# Altium PCB alertButton.PcbDoc (part 1 of 2)
Units mm, origin at the board's own origin, x right, y up, seen from the top; angles counter-clockwise.
Board outline 28.5 x 30 mm, 6 copper layers (Top Layer, Layer 1, Layer 2, Layer 3, Layer 4, Bottom Layer), stack 1.032 mm thick; 73 components, 33 nets, 250 pads, 221 vias.
Unrouted connection lines stored in the file: 13.
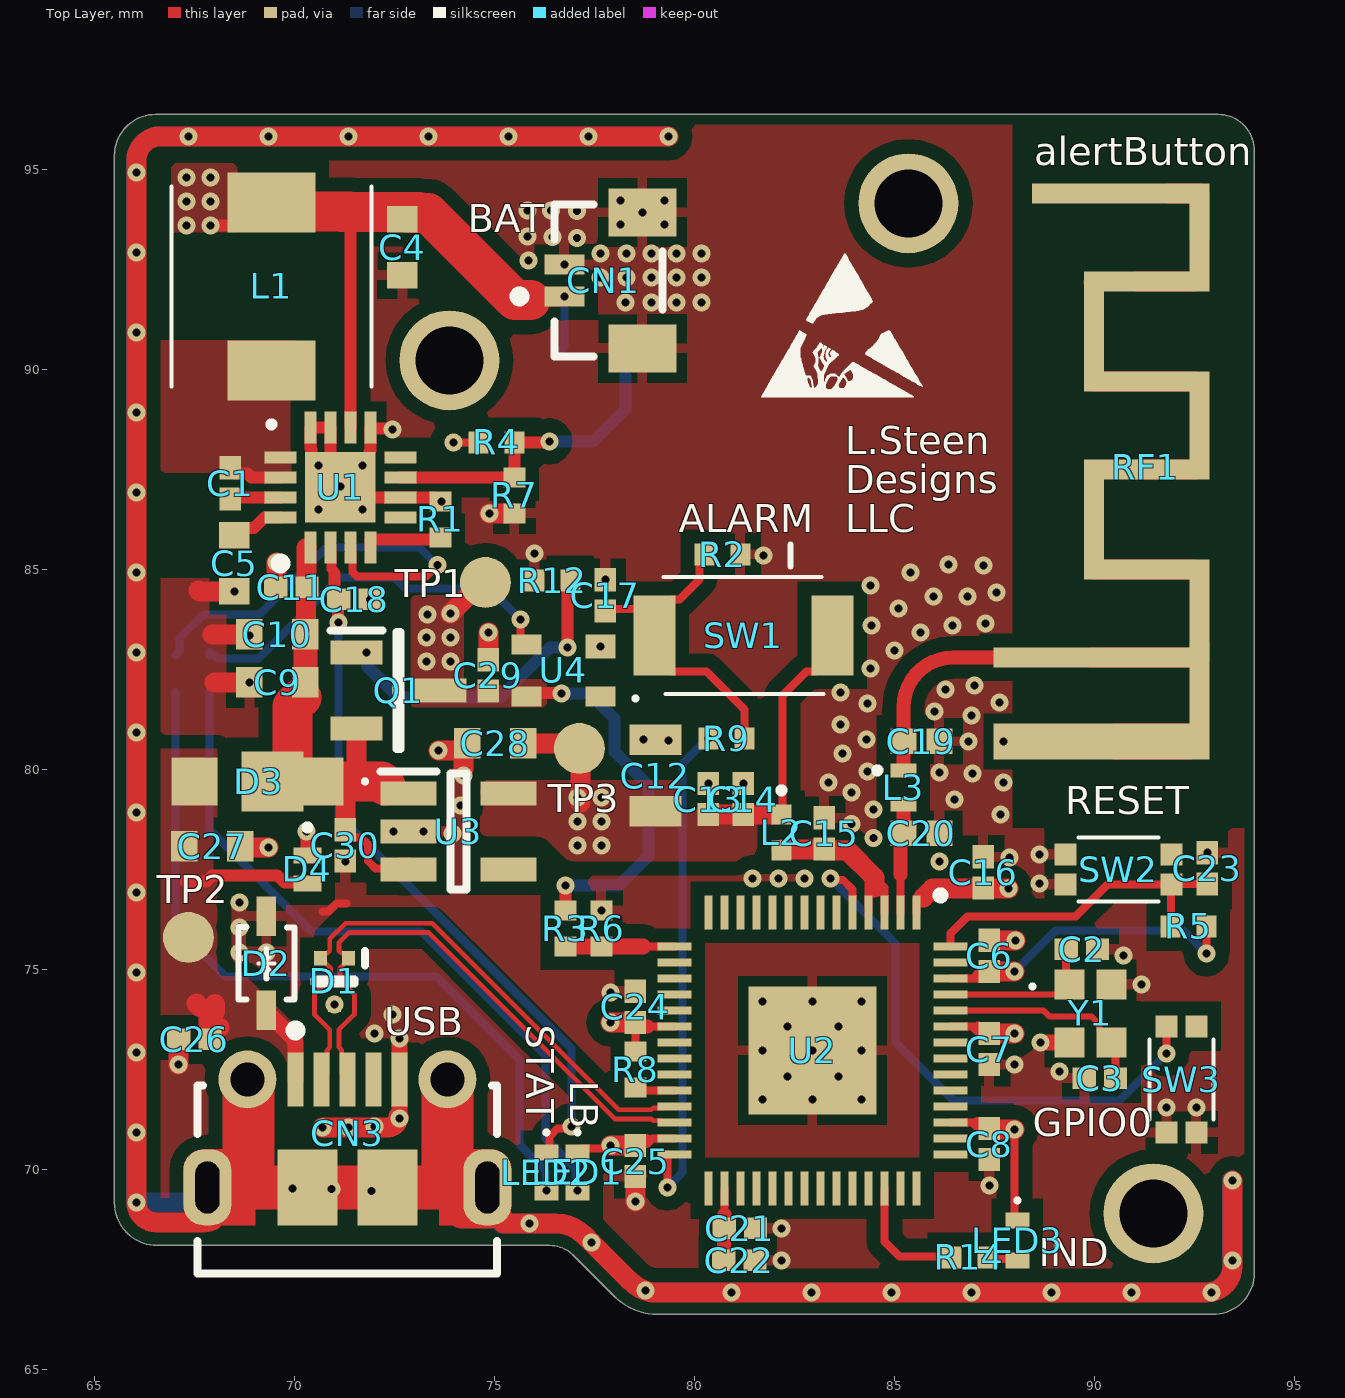
[diagram p0: Top Layer view]
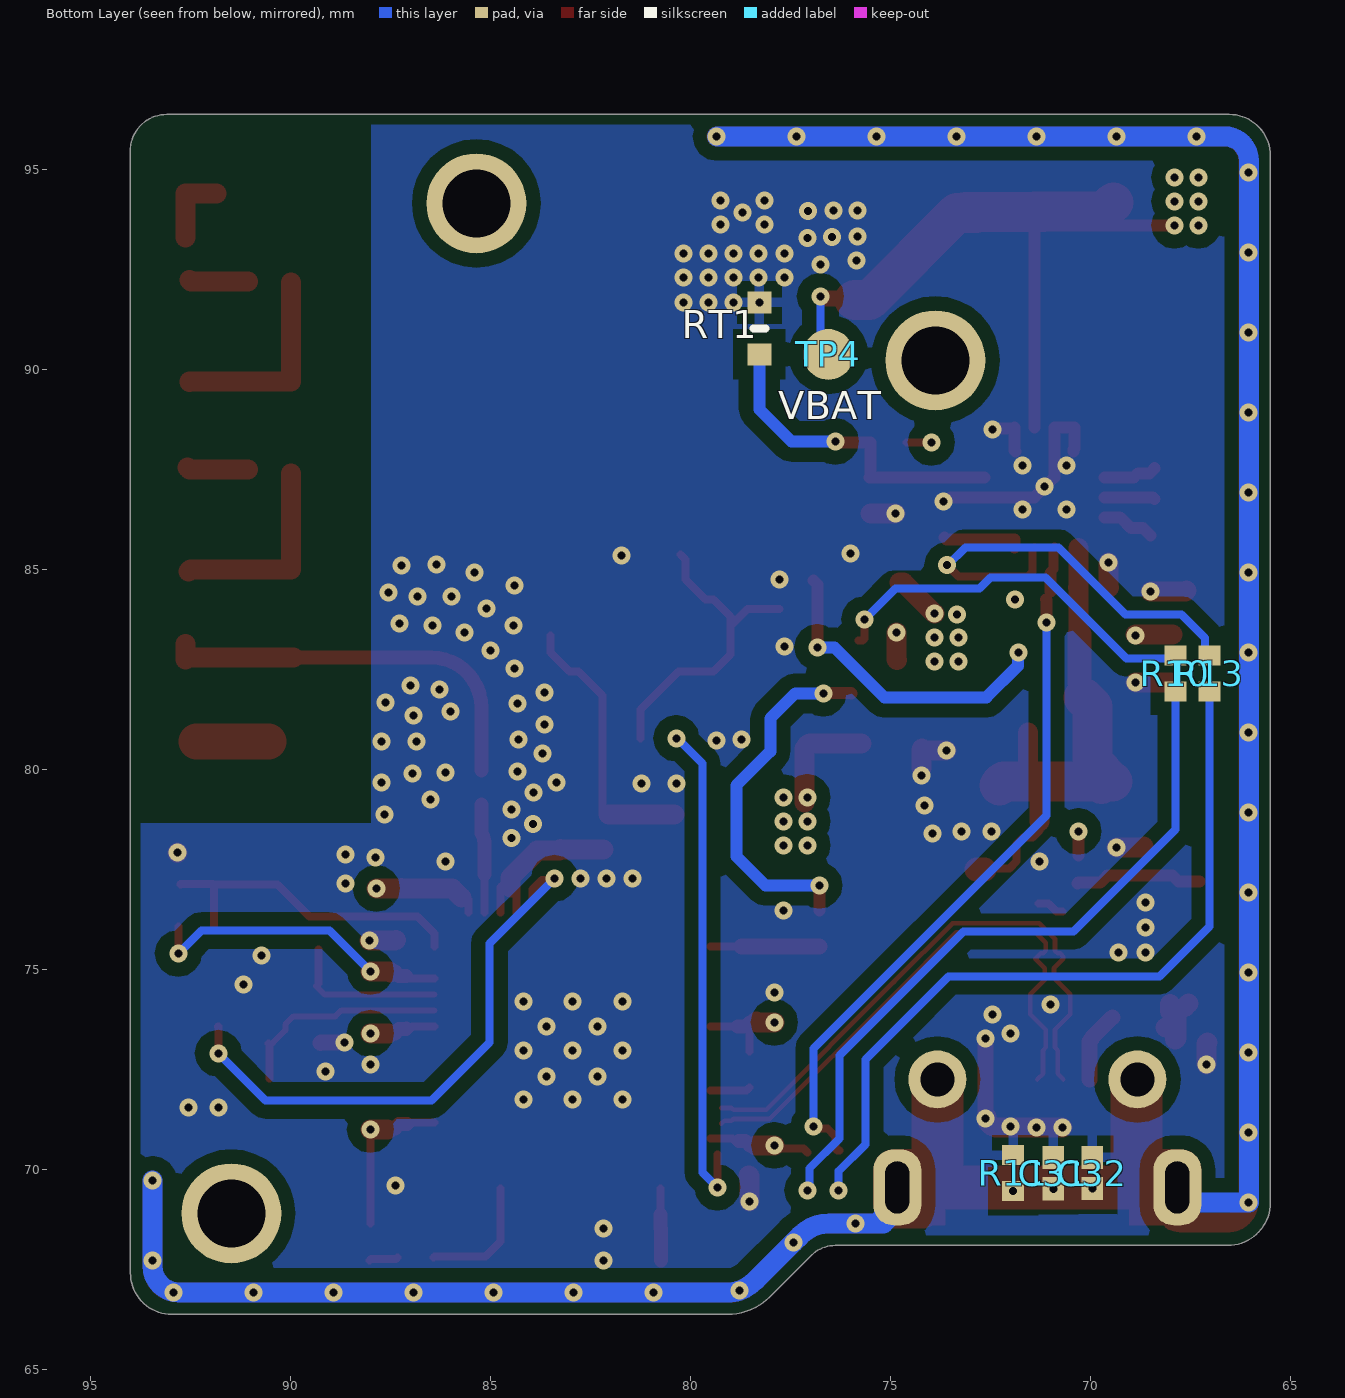
[diagram p1: Bottom Layer view, seen from below]
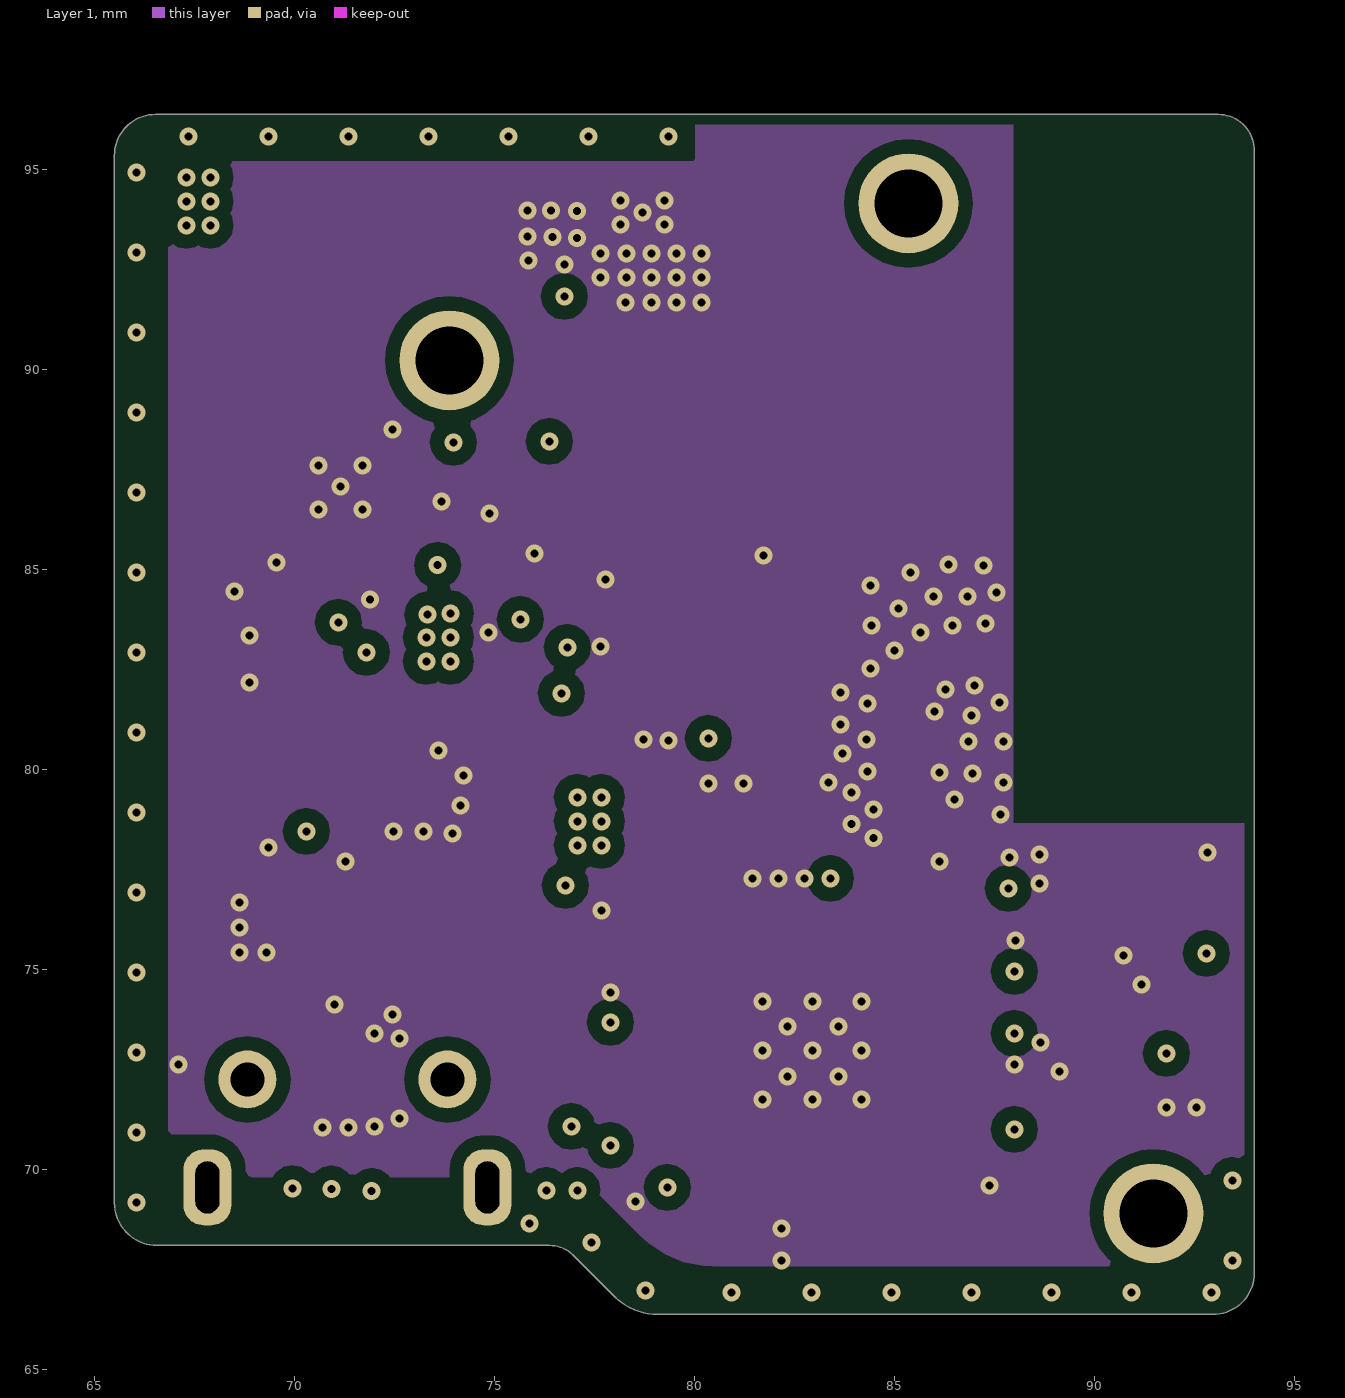
[diagram p2: Layer 1]
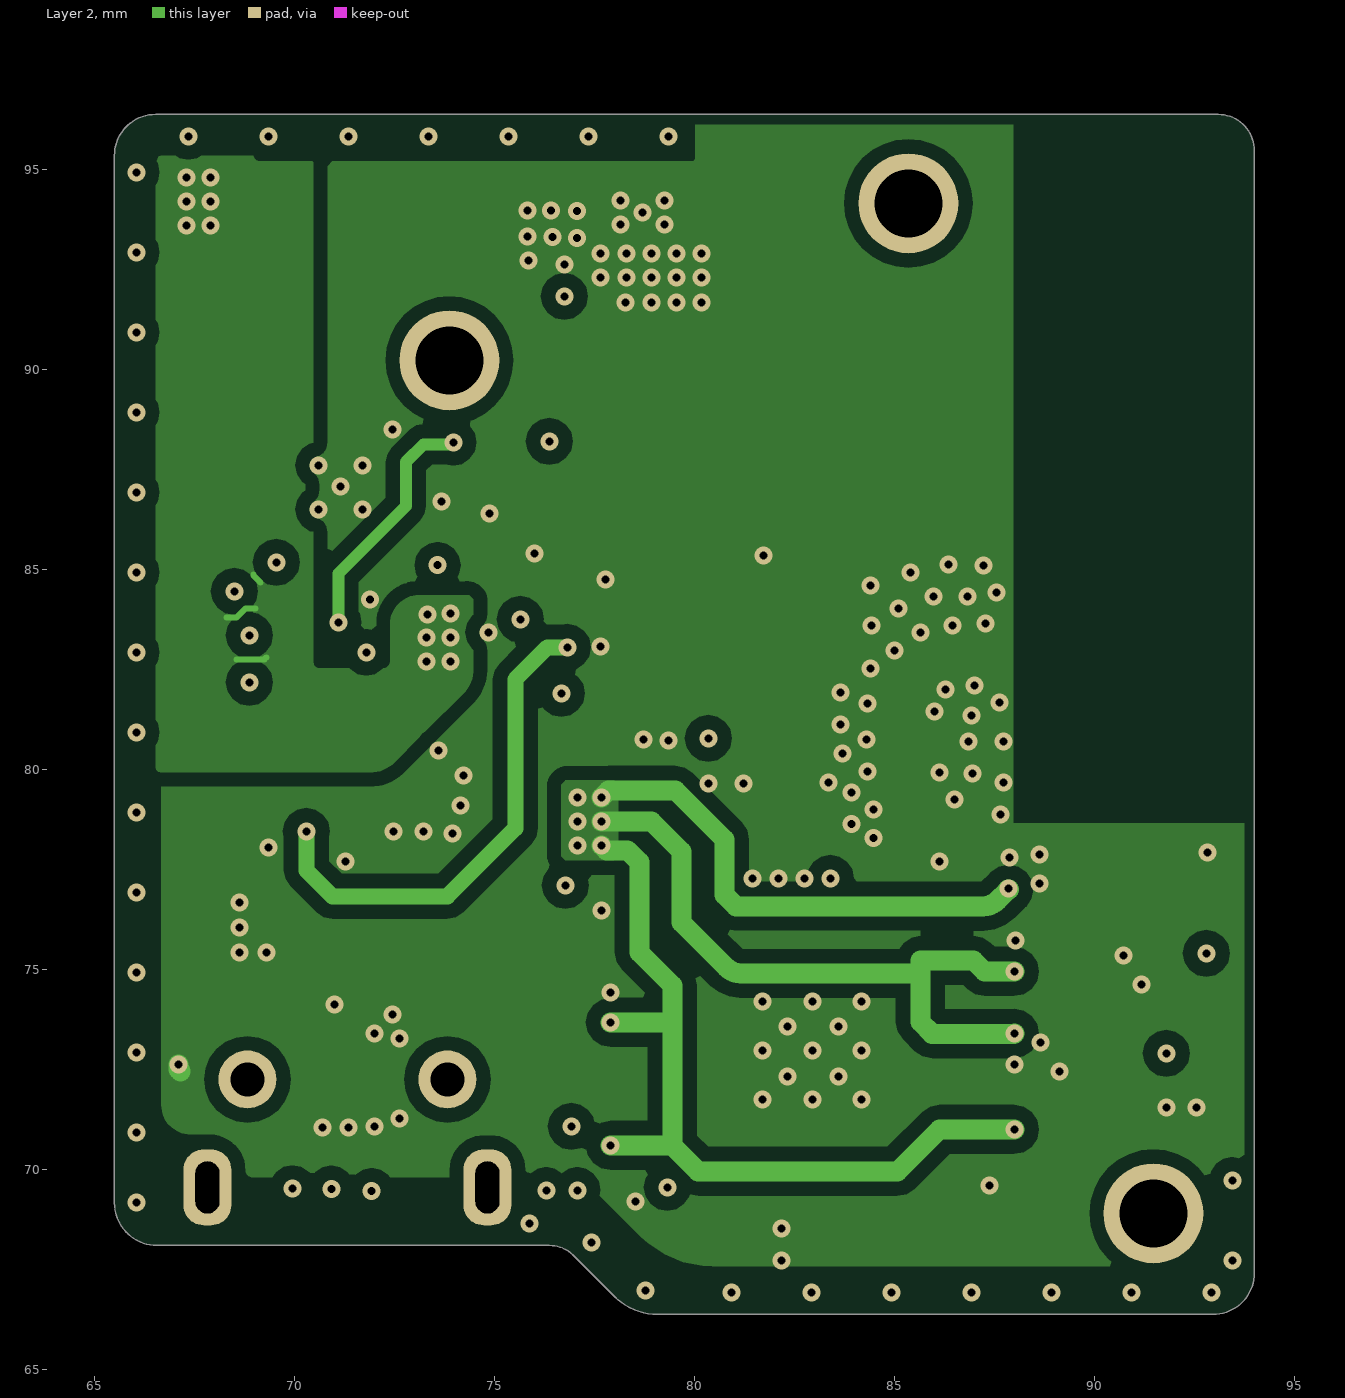
[diagram p3: Layer 2]
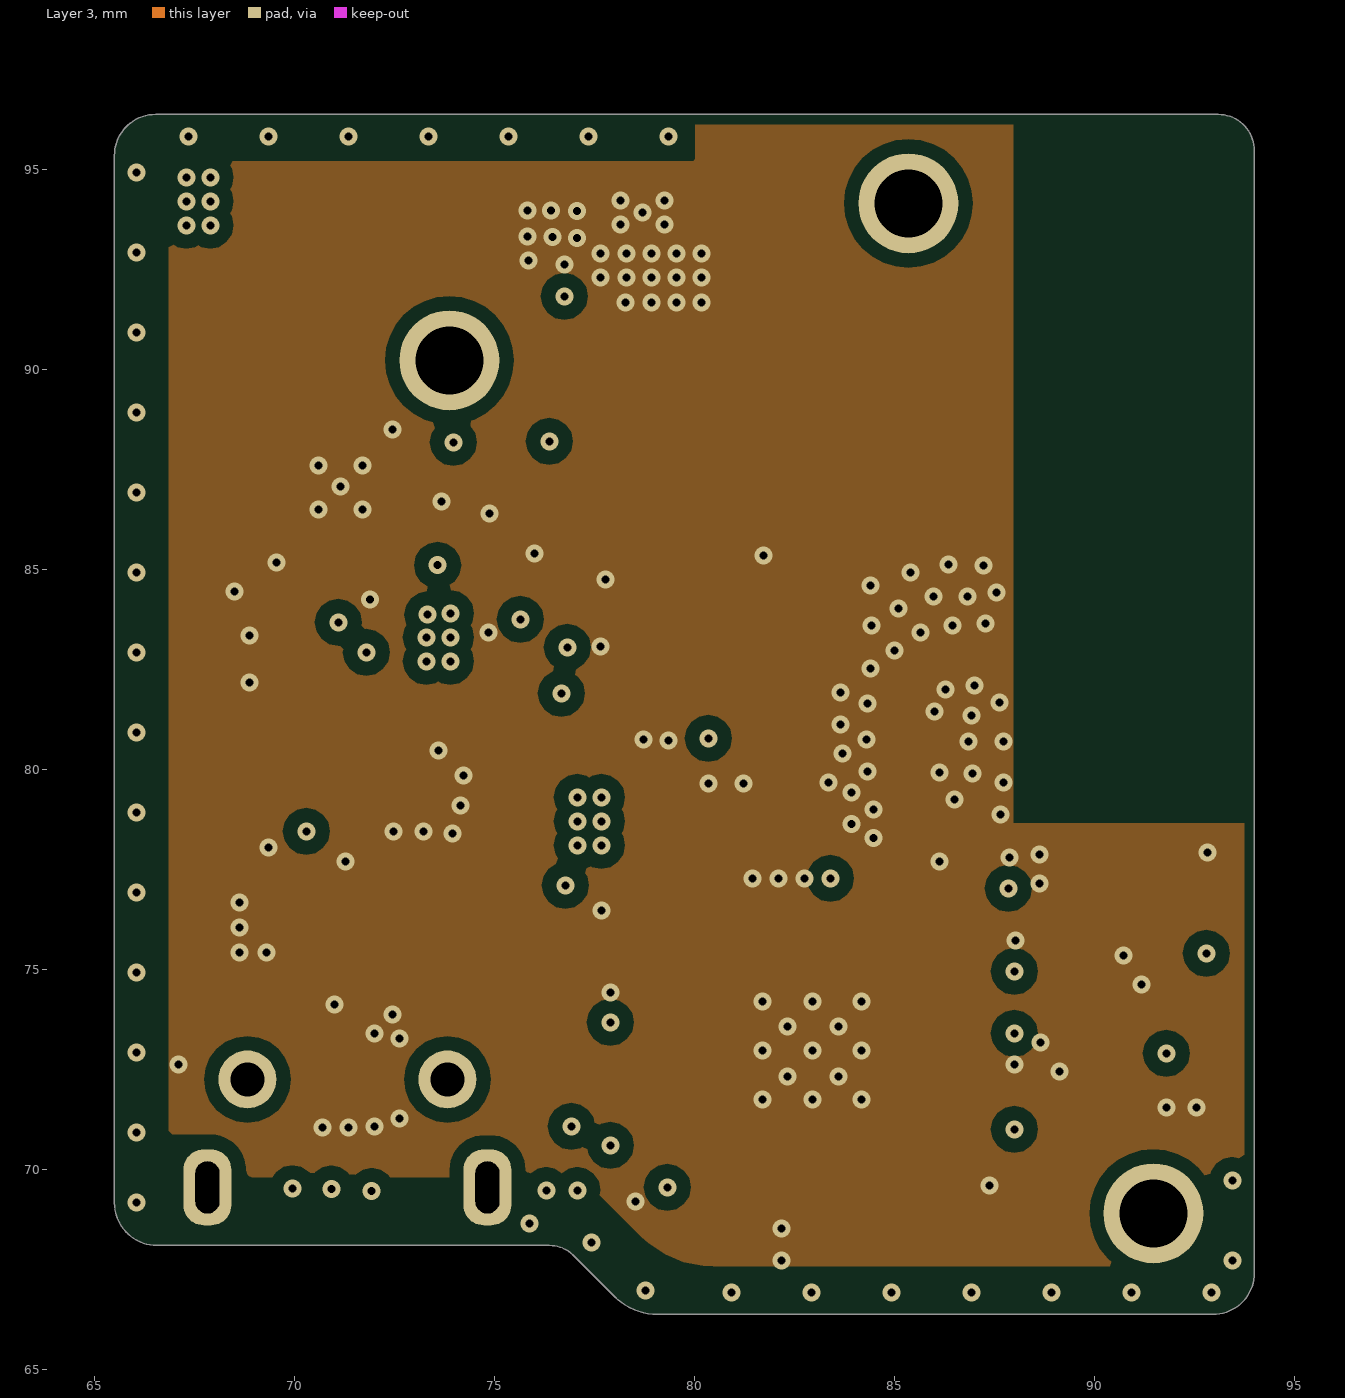
[diagram p4: Layer 3]
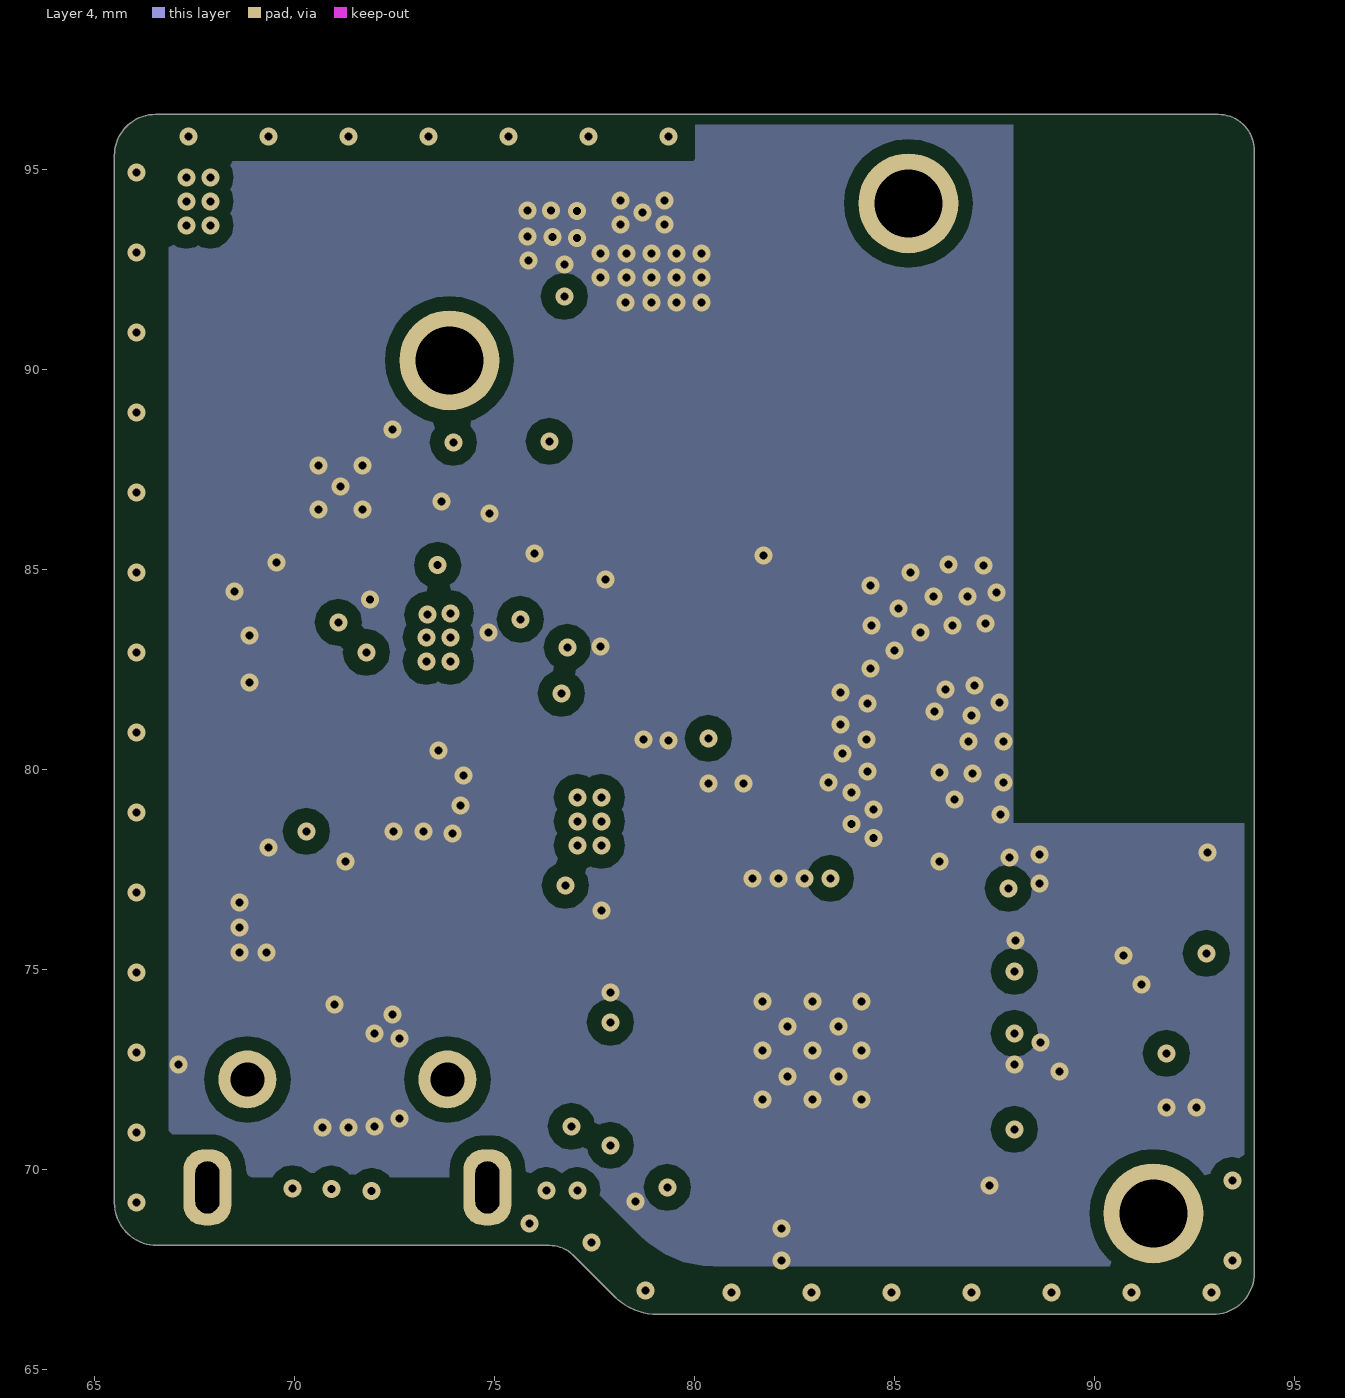
[diagram p5: Layer 4]
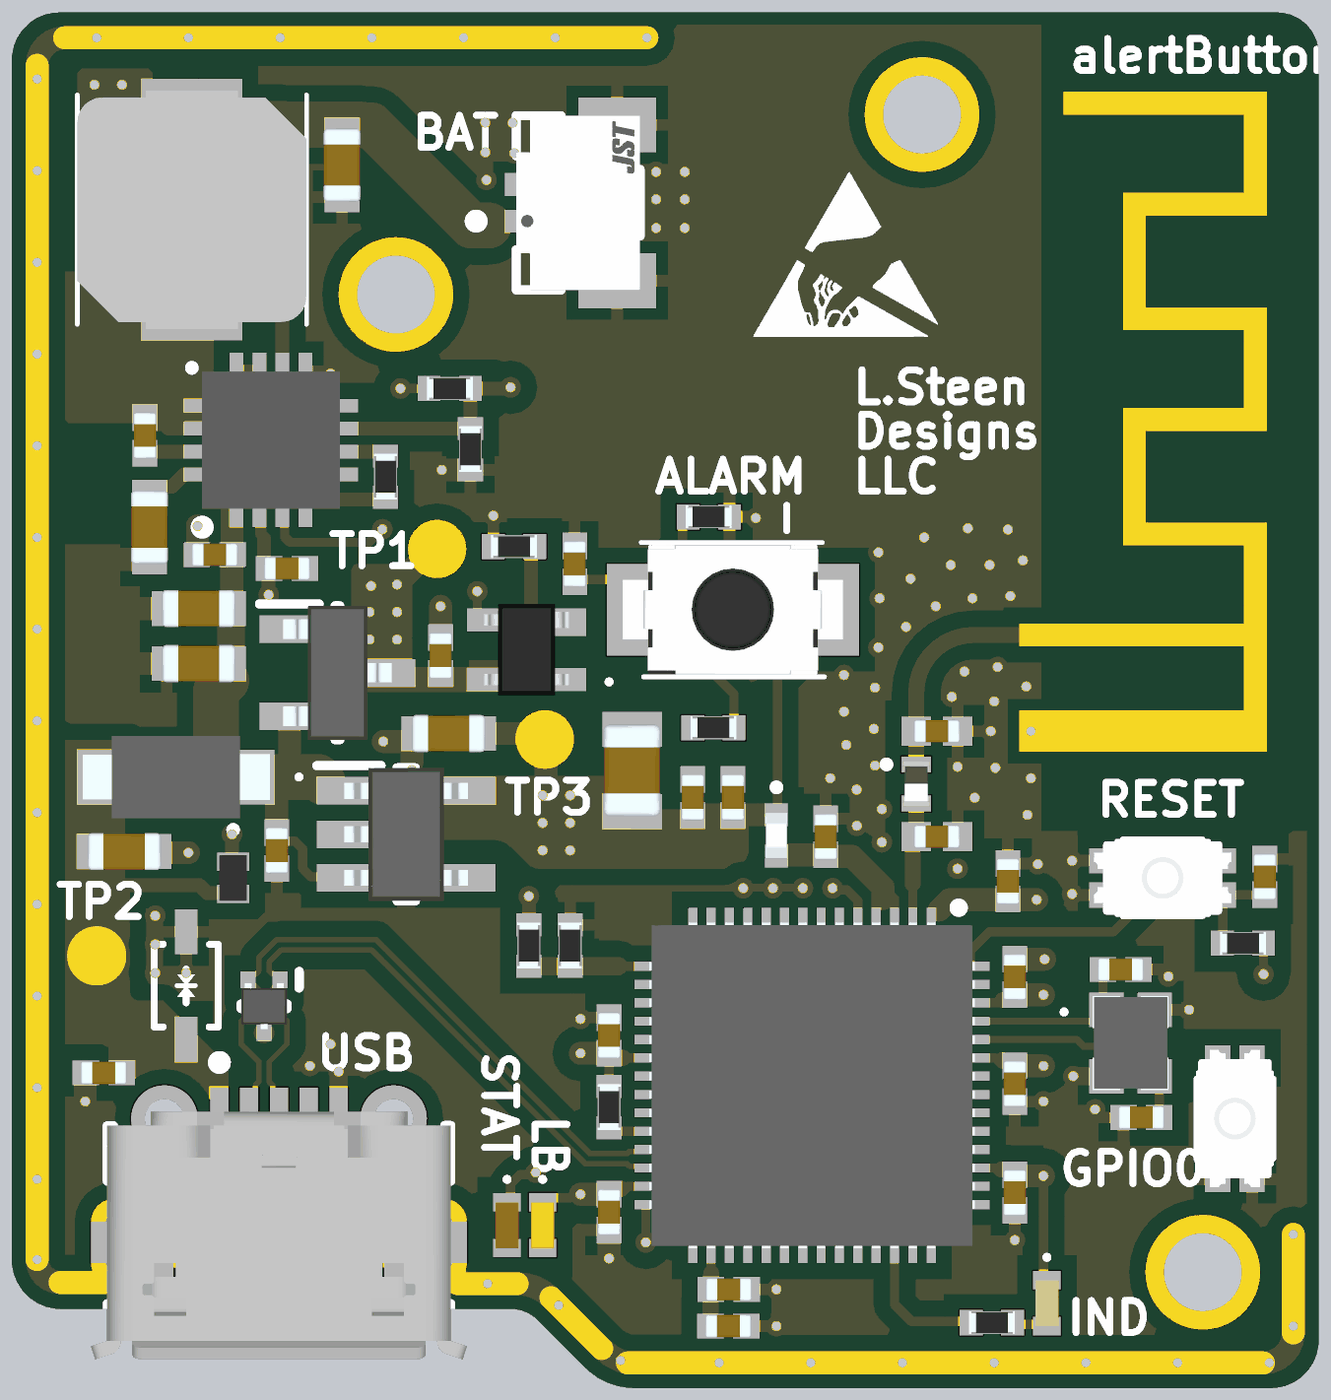
[diagram p6: 3D render of the assembled board from above, using the file's embedded part models]
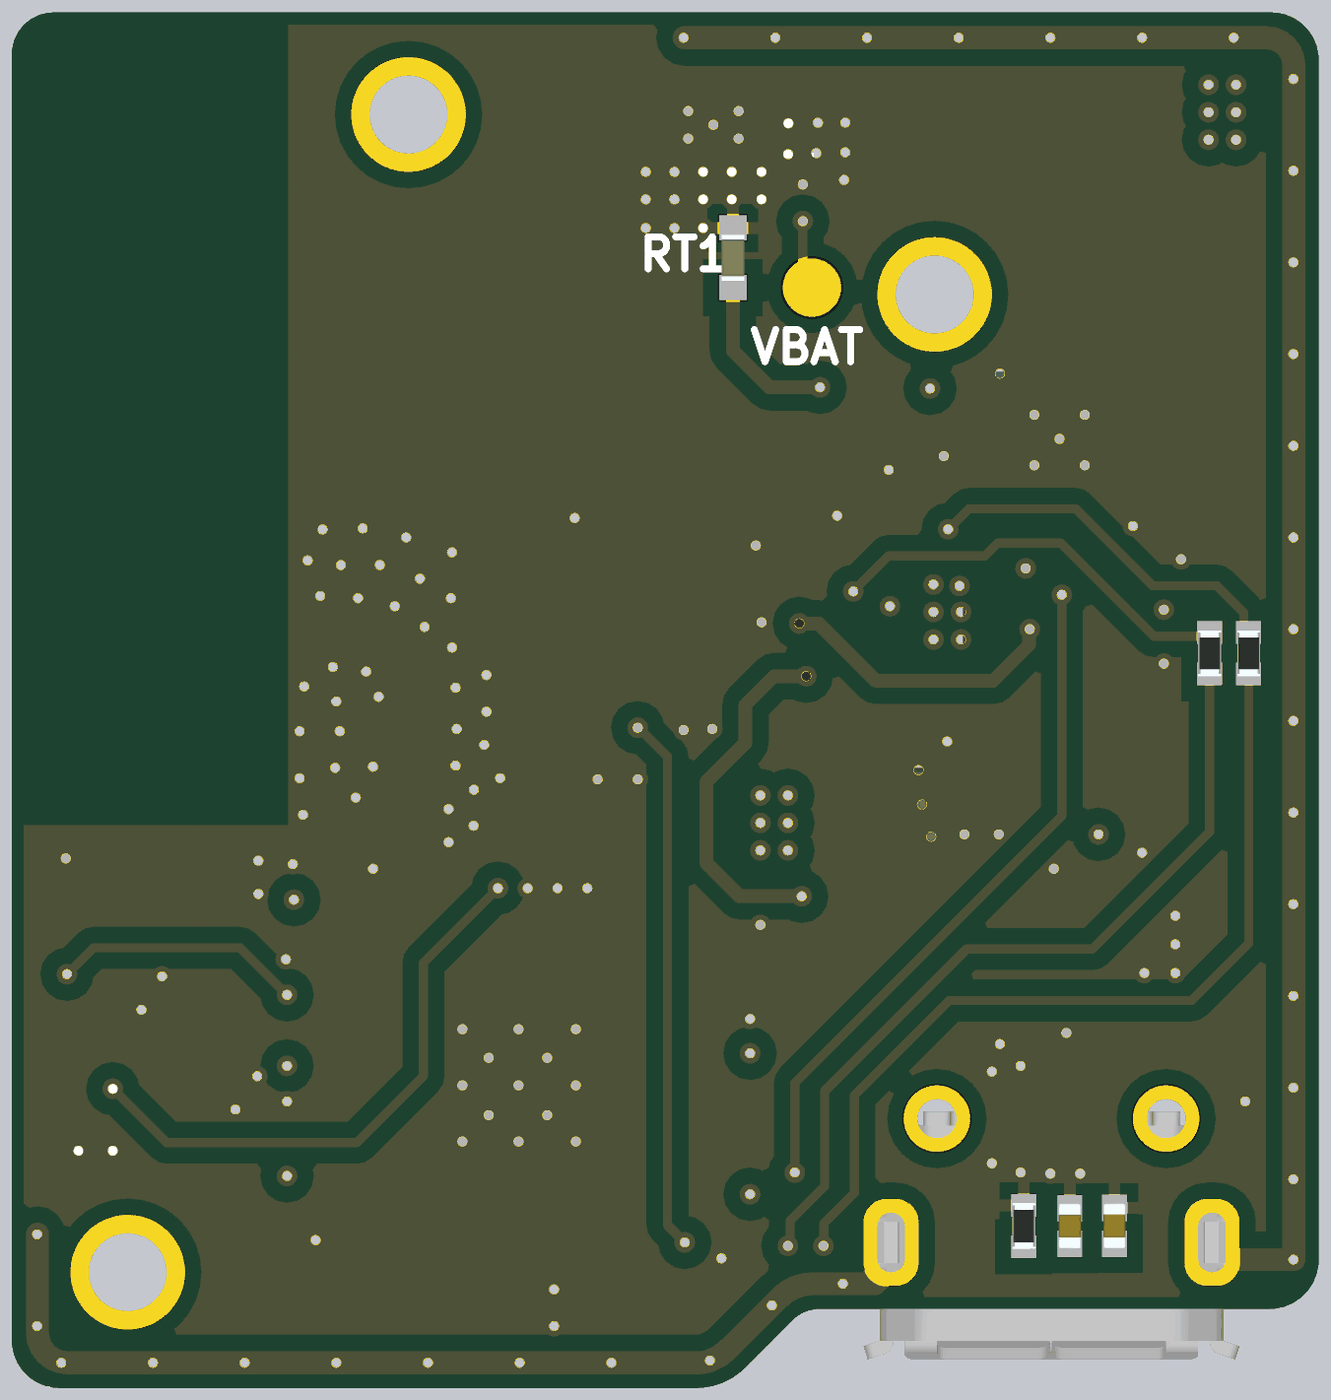
[diagram p7: 3D render of the assembled board from below, using the file's embedded part models]

## Layer stack, top to bottom
Top Solder: solder mask 0.0102, Solder Resist, Dk 3.8
Top Layer: signal copper 0.035
Dielectric 2: prepreg 0.0994, FR-4, Dk 4.1
Layer 1: signal copper 0.0152
Dielectric 4: core 0.25, PP-006, Dk 4.6
Layer 2: signal copper 0.0152
Dielectric 1: prepreg 0.2028, FR-4, Dk 4.16
Layer 3: signal copper 0.0152
Dielectric 5: core 0.25, PP-006, Dk 4.6
Layer 4: signal copper 0.0152
Dielectric 3: prepreg 0.0994, FR-4, Dk 4.1
Bottom Layer: signal copper 0.035
Bottom Solder: solder mask 0.0102, Solder Resist, Dk 3.8

## Board outline
65.5,69.167 65.5,95.345 cw(c66.53,95.345) 66.53,96.375 93.095,96.375 cw(c93.095,95.47) 94,95.47 94,67.414 cw(c92.961,67.414) 92.961,66.375 79.078,66.375 cw(c79.078,67.89) 78.006,66.819 76.972,67.853 ccw(c76.375,67.255) 76.375,68.1 66.567,68.1 cw(c66.567,69.167)

## Design rules (kind name [scope] priority, off if disabled: settings)
BoardOutlineClearance [All] p1: gap=0.254 ignorepadtopadclearanceinfootprint=FALSE except(0: Arc-OutlineEdge Arc-SplitContinuation Track-OutlineEdge Track-SplitContinuation SMDPad-OutlineEdge SMDPad-SplitContinuation THPad-SplitContinuation Via-OutlineEdge Via-SplitContinuation Fill-SplitContinuation Poly-SplitContinuation Region-OutlineEdge Region-SplitContinuation Text-OutlineEdge Text-SplitContinuation; 0.2: THPad-OutlineEdge)
Clearance [All] p1: gap=0.2 ignorepadtopadclearanceinfootprint=FALSE except(0.02: Fill-Hole; 0.09: Arc-Arc Arc-Track Track-Track; 0.127: SMDPad-SMDPad; 0.35: Arc-Fill Arc-Poly Arc-Region Track-Fill Track-Poly Track-Region SMDPad-Fill SMDPad-Poly SMDPad-Region THPad-Fill THPad-Poly THPad-Region Via-Fill Via-Poly Via-Region Fill-Fill Fill-Poly Fill-Region Poly-Poly Poly-Region Poly-Hole Region-Region)
ComponentClearance [All] p1: gap=0.15 collisioncheckmode=3 verticalgap=0.254 showdistances=FALSE
DiffPairsRouting PCIE [InDifferentialPairClass('PCIe Gen 3x1')] p1: maxlimit=0.254 minlimit=0.11 mostfreqgap=0.254 toplayer_maxgap=0.11 toplayer_prefgap=0.11 toplayer_minwidth=0.118 toplayer_maxwidth=0.118 toplayer_prefwidth=0.118 midlayer1_mingap=0.254 midlayer1_minwidth=0.381 midlayer1_maxwidth=0.381 midlayer1_prefwidth=0.381 midlayer2_maxgap=0.11 midlayer2_prefgap=0.11 midlayer2_minwidth=0.11 midlayer2_maxwidth=0.11 midlayer2_prefwidth=0.11 midlayer3_mingap=0.254 midlayer3_minwidth=0.381 midlayer3_maxwidth=0.381 midlayer3_prefwidth=0.381 midlayer4_mingap=0.254 midlayer4_minwidth=0.381 midlayer4_maxwidth=0.381 midlayer4_prefwidth=0.381 bottomlayer_maxgap=0.11 bottomlayer_prefgap=0.11 bottomlayer_minwidth=0.118 bottomlayer_maxwidth=0.118 bottomlayer_prefwidth=0.118 maxuncoupledlength=12.7
DiffPairsRouting HDMI_1 [InDifferentialPairClass('HDMI')] p2: maxlimit=0.254 minlimit=0.172 mostfreqgap=0.254 toplayer_maxgap=0.172 toplayer_prefgap=0.172 toplayer_minwidth=0.116 toplayer_maxwidth=0.116 toplayer_prefwidth=0.116 midlayer1_mingap=0.254 midlayer1_minwidth=0.381 midlayer1_maxwidth=0.381 midlayer1_prefwidth=0.381 midlayer2_mingap=0.174 midlayer2_maxgap=0.174 midlayer2_prefgap=0.174 midlayer2_minwidth=0.106 midlayer2_maxwidth=0.106 midlayer2_prefwidth=0.106 midlayer3_mingap=0.254 midlayer3_minwidth=0.381 midlayer3_maxwidth=0.381 midlayer3_prefwidth=0.381 midlayer4_mingap=0.254 midlayer4_minwidth=0.381 midlayer4_maxwidth=0.381 midlayer4_prefwidth=0.381 bottomlayer_maxgap=0.172 bottomlayer_prefgap=0.172 bottomlayer_minwidth=0.116 bottomlayer_maxwidth=0.116 bottomlayer_prefwidth=0.116 maxuncoupledlength=12.7
DiffPairsRouting USB [InDifferentialPairClass('USB 2.0')] p3: maxlimit=0.254 minlimit=0.11 mostfreqgap=0.254 toplayer_maxgap=0.11 toplayer_prefgap=0.11 toplayer_minwidth=0.118 toplayer_maxwidth=0.118 toplayer_prefwidth=0.118 midlayer1_mingap=0.254 midlayer1_minwidth=0.381 midlayer1_maxwidth=0.381 midlayer1_prefwidth=0.381 midlayer2_maxgap=0.11 midlayer2_prefgap=0.11 midlayer2_minwidth=0.11 midlayer2_maxwidth=0.11 midlayer2_prefwidth=0.11 midlayer3_mingap=0.254 midlayer3_minwidth=0.381 midlayer3_maxwidth=0.381 midlayer3_prefwidth=0.381 midlayer4_mingap=0.254 midlayer4_minwidth=0.381 midlayer4_maxwidth=0.381 midlayer4_prefwidth=0.381 bottomlayer_maxgap=0.11 bottomlayer_prefgap=0.11 bottomlayer_minwidth=0.118 bottomlayer_maxwidth=0.118 bottomlayer_prefwidth=0.118 maxuncoupledlength=12.7
HoleToHoleClearance [All] p1: gap=0.3 allowstackedmicrovias=TRUE
MatchedLengths PCIE_1 [InDifferentialPairClass('PCIe Gen 3x1')] p1: tolerance=0.127 checknetsindiffpair=TRUE checkdiffpairvsdiffpair=FALSE checkxsignals=FALSE checkothers=FALSE
MatchedLengths HDMI [InDifferentialPairClass('HDMI')] p2: tolerance=1.27 checknetsindiffpair=TRUE checkdiffpairvsdiffpair=FALSE checkxsignals=FALSE checkothers=FALSE
MatchedLengths "USB 2.0" [InDifferentialPairClass('USB 2.0')] p3: tolerance=1.27 checknetsindiffpair=TRUE checkdiffpairvsdiffpair=FALSE checkxsignals=FALSE checkothers=FALSE
MinimumSolderMaskSliver [All] p1: minsoldermaskwidth=0.1
PlaneClearance [All] p1: clearance=0.4
PolygonConnect GND [InNet('GND')] p1: thpad.connectstyle=Relief thpad.reliefconductorwidth=0.254 thpad.reliefentries=4 thpad.polygonreliefangle="90 Angle" thpad.airgapwidth=0.254 smdpad.connectstyle=Relief smdpad.reliefconductorwidth=0.254 smdpad.reliefentries=4 smdpad.polygonreliefangle="90 Angle" smdpad.airgapwidth=0.254 via.connectstyle=Direct via.reliefconductorwidth=0.254 via.reliefentries=4 via.polygonreliefangle="90 Angle" via.airgapwidth=0.254
PolygonConnect Other [All] p2: connectstyle=Direct reliefconductorwidth=0.254 reliefentries=4 polygonreliefangle="90 Angle" airgapwidth=0.254
RoutingCorners [All] p1: cornerstyle=Round minsetback=2.54 maxsetback=2.54
RoutingVias [All] p1: holewidth=0.2 width=0.45 viastyle="Through Hole" minholewidth=0.2 minwidth=0.45 maxholewidth=0.305 maxwidth=0.61
SilkToSilkClearance [All] p1: silktosilkclearance=0.05
SilkToSolderMaskClearance [IsPad] p1: minsilkscreentomaskgap=0.08 clearancetoexposedcopper=TRUE
SolderMaskExpansion [All] p1: expansion=0.033 istentingtop=FALSE
UnRoutedNet [All] p1: checkbadconnections=TRUE
Width [All] p1: maxlimit=4 minlimit=0.09 preferedwidth=0.175 toplayer_prefwidth=0.15 bottomlayer_prefwidth=0.15 minimp=50.000000 maximp=50.000000 favimp=50.000000
21 further rules are at their usual default settings.

## Classes and differential pairs
differential pair class "USB 2.0": D
differential pair D: +D_P -D_N

## Components (designator, comment, footprint, x,y, rotation, side; value= is the part's Value field where it differs from the comment)
C1 "47nF" CAPC1005X55N 68.4,87.15 r270 top
C2 "10pF" CAPC1005X55N 89.685,75.5 r0 top
C3 "10pF" CAPC1005X55N 90.135,72.275 r180 top
C4 "10uF" CAPC1608X90N 72.7,93.05 r270 top
C5 "10uF" CAPC1608X90N 68.5,85.15 r270 top
C6 "100pF" CAPC1005X55N 87.375,75.34 r90 top
C7 "1uF" CAPC1005X55N 87.375,73.01 r270 top
C8 "0.1uF" CAPC1005X55N 87.375,70.635 r270 top
C9 "10uF" CAPC1608X90N 69.575,82.175 r180 top
C10 "10uF" CAPC1608X90N 69.575,83.375 r180 top
C11 "2.2uF" CAPC1005X55N 69.925,84.55 r180 top
C12 "10uF" CAPC2012X140N 79.025,79.845 r90 top
C13 "1uF" CAPC1005X55N 80.35,79.26 r90 top
C14 "0.1uF" CAPC1005X55N 81.225,79.26 r90 top
C15 "0.1uF" CAPC1005X55N 83.25,78.4 r90 top
C16 "0.1uF" CAPC1005X55N 87.225,77.425 r90 top
C17 "0.1uF" CAPC1005X55N 77.775,84.35 r90 top
C18 "2.2uF" CAPC1005X55N 71.5,84.25 r0 top
C19 "2.7pF" CAPC1005X56N 85.675,80.7 r0 top
C20 "3.3pF" CAPC1005X56N 85.675,78.4 r0 top
C21 "0.1uF" CAPC1005X55N 81.135,68.525 r0 top
C22 "1uF" CAPC1005X55N 81.125,67.725 r0 top
C23 "1uF" CAPC1005X55N 92.825,77.525 r90 top
C24 "0.1uF" CAPC1005X55N 78.525,74.065 r90 top
C25 "0.1uF" CAPC1005X55N 78.525,70.21 r270 top
C26 "0.1uF" CAPC1005X55N 67.5,73.25 r180 top
C27 "10uF" CAPC1608X90N 67.95,78.075 r0 top
C28 "10uF" CAPC1608X90N 75.025,80.65 r180 top
C29 "0.1uF" CAPC1005X55N 74.85,82.35 r90 top
C30 "1uF" CAPC1005X55N 71.275,78.1 r270 top
C31 "0.1uF" CAPC1005X55N 70.925,69.905 r90 bottom
C32 "0.001uF" CAPC1005X55N 69.95,69.91 r90 bottom
CN1 "BAT" SM02B-SURS-TF(LF)(SN) 77.85,92.225 r90 top
CN3 "USB" 105017-0001 71.325,70.9 r0 top
D1 "TPD2E009DRTR" SOTFL35P100X50-3N 71,74.7 r270 top
D2 "GBLC08C-N" SOD-323_L1.8-W1.3-LS2.5-BI 69.3,75.15 r90 top
D3 "PMEG6020EXE-QX" PMEG6020EXEQX 69.113,79.7 r180 top
D4 "SBRT05U20LPSQ-7B" SBRT05U20LPSQ7B 70.325,77.5 r270 top
L1 "SPM5030T-1R0M-HZ" SPM5030 69.425,92.075 r90 top
L2 "MLG1005S2N0BTD25" MLG1005 82.175,78.425 r270 top
L3 "MHQ1005P2N4BT000" MHQ1005 85.225,79.55 r270 top
LED1 "LB" SM0402OC 77.075,69.925 r180 top
LED2 "STAT" SM0402RC 76.3,69.925 r180 top
LED3 "IND" SM0402GC 88.075,68.225 r180 top
Q1 "SI2301CDS-T1-E3" SOT95P237X112-3N 72.6,81.975 r0 top
R1 "204k" ERA2AED122X#1 73.65,86.25 r90 top
R2 "10k" ERA2AED122X#2 80.7,85.375 r0 top
R3 "40k" ERA2AED122X#1 76.775,76.025 r270 top
R4 "4.12k" ERA2AED122X#1 75.05,88.175 r0 top
R5 "10k" ERA2AED122X#1 92.35,76.075 r0 top
R6 "40k" ERA2AED122X#1 77.675,76.025 r90 top
R7 "19.1k" ERA2AED122X#1 75.5,86.85 r270 top
R8 "10k" ERA2AED122X#1 78.525,72.5 r270 top
R9 "1k" ERA2AED122X#2 80.8,80.775 r0 top
R10 "1k" ERA2AED122X#1 67.875,82.4 r90 bottom
R11 "1M" ERA2AED122X#1 71.93,69.906 r90 bottom
R12 "10k" ERA2AED122X#2 76.45,84.725 r180 top
R13 "1k" ERA2AED122X#1 67.025,82.4 r90 bottom
R14 "330R" ERA2AED122X#2 86.875,67.8 r180 top
RF1 "Antenna" SWRA117D 90.137,87.492 r90 top
RT1 "NTCG103JX103DTDS" THRMC1005X55N 78.275,91.025 r90 bottom
SW1 "ALARM" TS1088R02026 81.225,83.35 r0 top
SW2 "RESET" EVPBB0AAB000 90.6,77.5 r0 top
SW3 "GPIO0" EVPBB0AAB000 92.175,72.25 r90 top
TP1 "VBAT" TP#1 74.775,84.675 r90 top
TP2 "VBUS" TP#1 67.35,75.8 r0 top
TP3 "3V3" TP#1 77.125,80.525 r0 top
TP4 "VBAT" TP#2 76.55,90.375 r180 bottom
U1 "BQ25303JRTER" QFN50P300X300X80-17N-D 71.15,87.05 r90 top
U2 "ESP32-S2FN4R2" QFN40P700X700X90-57N-D 82.95,72.975 r270 top
U3 "ME6211C33M5G-N" SOT95P270X145-5N 74.1,78.45 r0 top
U4 "XC6136N35BNR-G" XC6136C12ANRG 76.725,82.475 r90 top
Y1 "ECS-400-10-37B-CKY-TR3" ECS4001037BCKYTR3 89.9,73.9 r270 top

## Footprints (in the part's own frame and the unit in brackets; to place one, negate y for a bottom-side part, rotate by r counter-clockwise, add the part's x,y. Pads: shape width x height; smd on the part's side, far side on the other; paste and mask are expansions set on the pad)
105017-0001 [mm]
  rect 0.4x1.35 smd: 1(-1.3,1.35) 2(-0.65,1.35) 3(0,1.35) 4(0.65,1.35) 5(1.3,1.35)
  round 1.45 hole 0.85: 6(-2.5,1.35)
  round 1.45 hole 0.85 paste+0: 7(2.5,1.35)
  rrect84% 1.2x1.9 hole 0.6 slot 1.3 at 90 deg mask+0.01: 8(-3.5,-1.35) 11(3.5,-1.35)
  rect 1.5x1.9 smd: 9(-1,-1.35) 10(1,-1.35)
  Top Layer circle w0.5: c-3.6,-0.9 r0.25
  Top Layer circle w0.5: c3.6,-0.9 r0.25
  Top Layer region: -3.6,-1.8 -3.6,-0.9 -4.1,-0.9 -4.1,-1.8
  Top Layer region: 3.6,-0.9 3.6,-1.8 4.1,-1.8 4.1,-0.9
  Top Layer region: 2.3,-0.4 2.3,-2.3 3.6,-2.3 3.6,-0.4
  Top Layer region: -2.3,-2.3 -2.3,-0.4 -3.6,-0.4 -3.6,-2.3
  Top Layer lines w0.5: -3.838,-1.725 ccw(c-3.6,-1.8) -3.35,-1.8 ccw(c-3.6,-1.8) -3.402,-1.647 ccw(c-3.6,-1.8) -3.838,-1.725 ; 3.656,-1.556 cw(c3.6,-1.8) 3.85,-1.8 cw(c3.6,-1.8) 3.668,-2.041 cw(c3.6,-1.8) 3.656,-1.556
  silkscreen extent -3.75,-3.5 3.75,2.7, body extent -4.1,-3.9 4.1,1.5, height 2.67
CAPC1005X55N [mm]
  rect 0.58x0.54 smd mask+0.01: 1(-0.39,0) 2(0.39,0)
  body extent -0.5,-0.25 0.5,0.25, height 0.55
CAPC1005X56N [mm]
  rect 0.65x0.64 smd mask+0.01: 1(-0.45,0) 2(0.45,0)
  body extent -0.5,-0.25 0.5,0.25, height 0.56
CAPC1608X90N [mm]
  rect 0.66x0.76 smd mask+0.01: 1(-0.7,0) 2(0.7,0)
  body extent -0.8,-0.41 0.8,0.41, height 0.9
CAPC2012X140N [mm]
  rect 0.76x1.3 smd mask+0.01: 1(-0.895,0) 2(0.895,0)
  body extent -1,-0.63 1,0.63, height 1.4
ECS4001037BCKYTR3 [mm]
  rect 0.75x0.75 smd mask+0.01: 1(-0.725,-0.525) 2(0.725,-0.525) 3(0.725,0.525) 4(-0.725,0.525)
  silkscreen extent -0.72,-1.5 -0.63,-1.4, body extent -1.02,-0.82 1.02,0.82, height 0.6
ERA2AED122X#1 [mm]
  rect 0.5x0.55 smd mask+0.01: 1(-0.45,0) 2(0.45,0)
  body extent -0.5,-0.25 0.5,0.25, height 0.35
ERA2AED122X#2 [mm]
  rect 0.5x0.55 smd: 1(-0.45,0) 2(0.45,0)
  body extent -0.5,-0.25 0.5,0.25, height 0.35
EVPBB0AAB000 [mm]
  rect 0.55x0.55 smd mask+0.01: A1(-1.325,0.375) A2(-1.325,-0.375) B1(1.325,0.375) B2(1.325,-0.375)
  silkscreen extent -1,-0.8 1,0.8, body extent -1.5,-0.9 1.5,0.9, height 0.45
MHQ1005 [mm]
  rect 0.35x0.65 smd: 1(-0.425,0) 2(0.425,0)
  silkscreen extent -0.47,-0.7 -0.38,-0.6, body extent -0.5,-0.3 0.5,0.3, height 0.5
MLG1005 [mm]
  rect 0.5x0.5 smd mask+0.01: 1(-0.45,0) 2(0.45,0)
  silkscreen extent -1.1,-0.05 -1,0.05, body extent -0.5,-0.25 0.5,0.25, height 0.5
PMEG6020EXEQX [mm]
  rect 1x1.2 smd mask+0.01: 1(-1.612,0)
  rect 1.15x1.2 smd mask+0.01: 2(1.612,0)
  rect 1.55x1.5 smd mask+0.01: 3(-0.337,0)
  silkscreen extent -2.7,-0.05 -2.6,0.05, body extent -2.01,-0.9 2.07,0.9, height 1.1
QFN40P700X700X90-57N-D [mm]
  rect 0.85x0.2 smd mask+0.01: 1(-3.45,2.6) 2(-3.45,2.2) 3(-3.45,1.8) 4(-3.45,1.4) 5(-3.45,1) 6(-3.45,0.6) 7(-3.45,0.2) 8(-3.45,-0.2) 9(-3.45,-0.6) 10(-3.45,-1) 11(-3.45,-1.4) 12(-3.45,-1.8) 13(-3.45,-2.2) 14(-3.45,-2.6) 29(3.45,-2.6) 30(3.45,-2.2) 31(3.45,-1.8) 32(3.45,-1.4) 33(3.45,-1) 34(3.45,-0.6) 35(3.45,-0.2) 36(3.45,0.2) 37(3.45,0.6) 38(3.45,1) 39(3.45,1.4) 40(3.45,1.8) 41(3.45,2.2) 42(3.45,2.6)
  rect 0.2x0.85 smd mask+0.01: 15(-2.6,-3.45) 16(-2.2,-3.45) 17(-1.8,-3.45) 18(-1.4,-3.45) 19(-1,-3.45) 20(-0.6,-3.45) 21(-0.2,-3.45) 22(0.2,-3.45) 23(0.6,-3.45) 24(1,-3.45) 25(1.4,-3.45) 26(1.8,-3.45) 27(2.2,-3.45) 28(2.6,-3.45) 43(2.6,3.45) 44(2.2,3.45) 45(1.8,3.45) 46(1.4,3.45) 47(1,3.45) 48(0.6,3.45) 49(0.2,3.45) 50(-0.2,3.45) 51(-0.6,3.45) 52(-1,3.45) 53(-1.4,3.45) 54(-1.8,3.45) 55(-2.2,3.45) 56(-2.6,3.45)
  rect 3.2x3.2 smd mask+0.01: 57(0,0)
  silkscreen extent -3.97,3.1 -3.78,3.3, body extent -3.55,-3.55 3.55,3.55, height 0.9
QFN50P300X300X80-17N-D [mm]
  rect 0.8x0.3 smd mask+0.01: 1(-1.5,0.75) 2(-1.5,0.25) 3(-1.5,-0.25) 4(-1.5,-0.75) 9(1.5,-0.75) 10(1.5,-0.25) 11(1.5,0.25) 12(1.5,0.75)
  rect 0.3x0.8 smd mask+0.01: 5(-0.75,-1.5) 6(-0.25,-1.5) 7(0.25,-1.5) 8(0.75,-1.5) 13(0.75,1.5) 14(0.25,1.5) 15(-0.25,1.5) 16(-0.75,1.5)
  rect 1.76x1.76 smd mask+0.01: 17(0,0)
  silkscreen extent -2.02,1.37 -1.78,1.62, body extent -1.5,-1.5 1.5,1.5, height 0.8
SBRT05U20LPSQ7B [mm]
  rect 0.4x0.7 smd mask+0.01: 1(-0.35,0) 2(0.35,0)
  silkscreen extent -1.1,-0.05 -1,0.05, body extent -0.5,-0.3 0.5,0.3, height 0.36
SM02B-SURS-TF(LF)(SN) [mm]
  rect 0.5x1 smd paste+0 mask+0.01: 1(-0.4,1.1) 2(0.4,1.1)
  rect 1.2x1.7 smd paste+0 mask+0.01: 3(-1.7,-0.85) 4(1.7,-0.85)
  silkscreen extent -1.9,-1.35 1.9,2.35, body extent -2.4,-1.8 2.4,1.7, height 0.25
SM0402GC [mm]
  rect 0.6x0.4 smd: 1(0,-0.5) 2(0,0.5)
  silkscreen extent -0.05,-1.05 0.05,-0.95, body extent -0.25,-0.5 0.25,0.5, height 0.5
SM0402OC [mm]
  rect 0.6x0.4 smd: 1(0,-0.5) 2(0,0.5)
  silkscreen extent -0.05,-1.05 0.05,-0.95, body extent -0.25,-0.5 0.25,0.5, height 0.5
SM0402RC [mm]
  rect 0.6x0.4 smd mask+0.01: 1(0,-0.5) 2(0,0.5)
  silkscreen extent -0.05,-1.05 0.05,-0.95, body extent -0.25,-0.5 0.25,0.5, height 0.5
SOD-323_L1.8-W1.3-LS2.5-BI [mm]
  rect 0.985x0.49 smd mask+0.01: 1(-1.175,0) 2(1.175,0)
  silkscreen extent -0.9,-0.7 0.9,0.7
SOT95P237X112-3N [mm]
  rect 1.3x0.6 smd mask+0.01: 1(-1.05,0.95) 2(-1.05,-0.95) 3(1.05,0)
  silkscreen extent -1.7,-1.46 0.05,1.5, body extent -1.18,-1.46 1.18,1.46, height 1.12
SOT95P270X145-5N [mm]
  rect 1.4x0.6 smd mask+0.01: 1(-1.25,0.95) 2(-1.25,0) 3(-1.25,-0.95) 4(1.25,-0.95) 5(1.25,0.95)
  silkscreen extent -1.95,-1.45 0.2,1.5, body extent -1.35,-1.45 1.35,1.45, height 1.45
SOTFL35P100X50-3N [mm]
  rect 0.36x0.33 smd mask+0.01: 1(-0.58,0.35) 2(-0.58,-0.35) 3(0.58,0)
  silkscreen extent -0.76,-0.5 0.05,0.76, body extent -0.5,-0.5 0.5,0.5, height 0.5
SPM5030 [mm]
  rect 1.5x2.2 smd mask+0.01: 1(-2.1,0) 2(2.1,0)
  silkscreen extent -3.5,-2.5 2.5,2.5, body extent -2.6,-2.5 2.6,2.5, height 3
SWRA117D [mm]
  rect 5x0.5 smd paste-1 mask+0: 1(-4.742,-2.487)
  rect 0.5x4.9 smd paste-1 mask+0: 1(-4.692,0.212)
  rect 0.5x2.64 smd paste-1 mask+0: 1(-2.492,-0.919) 1(0.006,-0.918) 1(2.206,-0.918) 1(4.704,-0.918)
  rect 2x0.5 smd paste-1 mask+0: 1(-1.243,0.151) 1(3.455,0.152)
  rect 2.7x0.5 smd paste-1 mask+0: 1(1.106,-2.487) 1(5.804,-2.487)
  rect 0.5x3.94 smd paste-1 mask+0: 1(6.904,-0.268)
  rect 0.9x4.9 smd paste-1 mask+0: 2(-6.792,0.212)
THRMC1005X55N [mm]
  rect 0.55x0.6 smd: 1(-0.65,0) 2(0.65,0)
  silkscreen extent 0,-0.15 0,0.15, body extent -0.5,-0.25 0.5,0.25, height 0.55
TP#1 [mm]
  round 1.27 smd paste-2539.97 mask+0.01: 1(0,0)
TP#2 [mm]
  round 1.27 smd paste-2539.97 mask+0.051: 1(0,0)
TS1088R02026 [mm]
  rect 1.05x2 smd: 1(-2.225,0) 2(2.225,0)
  silkscreen extent -2,-1.47 2,1.47, body extent -2.4,-1.42 2.4,1.42, height 2
XC6136C12ANRG [mm]
  rect 0.5x0.75 smd mask+0.01: 1(-0.65,-0.925) 3(0.65,0.925) 4(-0.65,0.925)
  rect 0.6x0.75 smd mask+0.01: 2(0.6,-0.925)
  silkscreen extent -0.75,-1.85 -0.65,-1.75, body extent -1,-0.93 1,0.93, height 1.16

## Part data
C1 C2 C3 C6 C7 C8 C11 C13 C14 C15 C16 C17 C18 C21 C22 C23 C24 C25 C26 C29 C30 C31 C32: library part C0402, "C0402", Height=0.55mm
C4 C5 C9 C10 C27 C28: library part C0603, "C0603", Height=0.9mm
C12: library part C0805, "C0805", Height=1.4mm
C19: library part 04023U2R7BAT2A, "C0402", Manufacturer_Name="Kyocera AVX", Mouser Part Number=581-04023U2.7B, Arrow Part Number=04023U2R7BAT2A, Arrow Price/Stock=https://www.arrow.com/en/products/04023u2r7bat2a/avx, Datasheet Link=http://www.mouser.com/catalog/supplier/library/pdf/AVXSurfaceMountCeramic.pdf, Height=0.56mm, Manufacturer_Part_Number=04023U2R7BAT2A, Mouser Price/Stock=https://www.mouser.co.uk/ProductDetail/AVX/04023U2R7BAT2A?qs=btToBMqunHouu%252BPwi6Y2gg%3D%3D
C20: library part 04023A3R3CAT2A, "C0402", Manufacturer_Name="Kyocera AVX", Arrow Part Number=04023A3R3CAT2A, Arrow Price/Stock=https://www.arrow.com/en/products/04023a3r3cat2a/avx, Datasheet Link=http://www.mouser.com/catalog/supplier/library/pdf/AVXSurfaceMountCeramic.pdf, Height=0.56mm, Manufacturer_Part_Number=04023A3R3CAT2A
CN1: library part SM02B-SURS-TF(LF)(SN), "Connector", LCSC_Part_Number=C566239, Manufacturer_Name=Apem, Mouser Part Number=306-SM02B-SURS-TF(LF)(SN), Datasheet Link=https://media.digikey.com/pdf/Data%20Sheets/APEM%20Components%20PDFs/APTCLGTV.pdf, Height=1.87mm, Manufacturer_Part_Number=SM02B-SURS-TF(LF)(SN), Mouser Price/Stock=https://www.mouser.co.uk/ProductDetail/Apem/APTCLGTVTR?qs=ikKlZSMjbcRNf%252Bwzp31ctg%3D%3D, Supplier 1=Mouser
CN3: library part 105017-0001, "Micro USB Connector", Manufacturer_Name=Molex, Mouser Part Number=538-105017-0001, Manufacturer_Part_Number=105017-0001, Supplier 1=Mouser, Supplier 2=Digikey, Supplier Part Number 1=538-105017-0001, Supplier Part Number 2=WM1399CT-ND
D1: "Integrated Circuit", Manufacturer_Name="Texas Instruments", Mouser Part Number=595-TPD2E009DRTR, Arrow Part Number=TPD2E009DRTR, Arrow Price/Stock=https://www.arrow.com/en/products/tpd2e009drtr/texas-instruments?region=nac, Datasheet Link=https://www.ti.com/lit/ds/symlink/tpd2e009.pdf?ts=1621336941637&ref_url=https%253A%252F%252Fwww.google.com%252F, Height=0.5mm, Manufacturer_Part_Number=TPD2E009DRTR, Mouser Price/Stock=https://www.mouser.co.uk/ProductDetail/Texas-Instruments/TPD2E009DRTR?qs=XGzIaZb%2FFYLhG8oL%2FM05Rg%3D%3D, Supplier 1=Mouser, Supplier Part Number 1=595-TPD2E009DRTR
D2: "ESD DIODE-BI_LCSC#C314256"
D3: "Schottky Diode", Manufacturer_Name=Nexperia, Supplier Part Number 1=771-PMEG6020EXE-Q, Datasheet Link=https://assets.nexperia.com/documents/data-sheet/PMEG6020EXE-Q.pdf, Height=1mm, Manufacturer_Part_Number=PMEG6020EXE-QX, Supplier 1=Mouser
D4: "Diode", Manufacturer_Name="Diodes Incorporated", Mouser Part Number=621-SBRT05U20LPSQ-7B, Arrow Part Number=SBRT05U20LPSQ-7B, Arrow Price/Stock=https://www.arrow.com/en/products/sbrt05u20lpsq-7b/diodes-incorporated?region=nac, Datasheet Link=https://componentsearchengine.com/Datasheets/2/SBRT05U20LPSQ-7B.pdf, Height=0.4mm, Manufacturer_Part_Number=SBRT05U20LPSQ-7B, Mouser Price/Stock=https://www.mouser.co.uk/ProductDetail/Diodes-Incorporated/SBRT05U20LPSQ-7B?qs=Cb2nCFKsA8rYOfAdmv62Rg%3D%3D
L1: "Inductor (FeSi Core)", Manufacturer_Name=TDK, Mouser Part Number=810-SPM5030T-1R0M-HZ, Arrow Part Number=SPM5030T-1R0M-HZ, Arrow Price/Stock=https://www.arrow.com/en/products/spm5030t-1r0m-hz/tdk, Datasheet Link=https://product.tdk.com/system/files/dam/doc/product/inductor/inductor/smd/catalog/inductor_automotive_power_spm5030-hz_en.pdf, Manufacturer_Part_Number=SPM5030T-1R0M-HZ, Mouser Price/Stock=https://www.mouser.co.uk/ProductDetail/TDK/SPM5030T-1R0M-HZ?qs=lYGu3FyN48f37%252BxFpB09sg%3D%3D
L2: "Inductor", Manufacturer_Name=TDK, Mouser Part Number=810-MLG1005S2N0BTD25, Supplier Part Number 1=C404617, Arrow Part Number=MLG1005S2N0BTD25, Arrow Price/Stock=https://www.arrow.com/en/products/mlg1005s2n0btd25/tdk, Datasheet Link=https://product.tdk.com/system/files/dam/doc/product/inductor/inductor/smd/catalog/inductor_automotive_high-frequency_mlg1005s_en.pdf, Manufacturer_Part_Number=MLG1005S2N0BTD25, Mouser Price/Stock=https://www.mouser.co.uk/ProductDetail/TDK/MLG1005S2N0BTD25?qs=u4%252BEJ9urDARbfrK%2Fvep%2FGg%3D%3D, Supplier 1=LCSC, Supplier 2=Mouser, Supplier Part Number 2=810-MLG1005S2N0BTD25
L3: "Inductor", Manufacturer_Name=TDK, Datasheet Link=https://product.tdk.com/system/files/dam/doc/product/inductor/inductor/smd/catalog/inductor_commercial_high-frequency_mhq1005p_en.pdf, Manufacturer_Part_Number=MHQ1005P2N4BT000
LED1: library part SM0402OC, "LED ORANGE", Manufacturer_Name=Bivar, Mouser Part Number=749-SM0402OC, Arrow Part Number=SM0402OC, Datasheet Link=https://www.bivar.com/parts_content/Datasheets/SM0402OC.pdf, Height=0.6524mm, Manufacturer_Part_Number=SM0402OC
LED2: library part SM0402RC, "LED RED", Manufacturer_Name=Bivar, Mouser Part Number=749-SM0402RC, Arrow Part Number=SM0402RC, Arrow Price/Stock=https://www.arrow.com/en/products/sm0402rc/bivar?region=nac, Datasheet Link=https://www.bivar.com/parts_content/Datasheets/SM0402RC.pdf, Height=0.6524mm, Manufacturer_Part_Number=SM0402RC, Mouser Price/Stock=https://www.mouser.co.uk/ProductDetail/Bivar/SM0402RC?qs=AQlKX63v8RtYE%2FAH%2F7Qnaw%3D%3D
LED3: library part SM0402GC, "LED GREEN", Manufacturer_Name=Bivar, Mouser Part Number=749-SM0402GC, Arrow Part Number=SM0402GC, Arrow Price/Stock=https://www.arrow.com/en/products/sm0402gc/bivar?region=nac, Datasheet Link=https://www.bivar.com/parts_content/Datasheets/SM0402GC.pdf, Height=0.6524mm, Manufacturer_Part_Number=SM0402GC, Mouser Price/Stock=https://www.mouser.co.uk/ProductDetail/Bivar/SM0402GC?qs=AQlKX63v8RuLeMPnNMtW7A%3D%3D
Q1: "MOSFET (P-Channel)", Manufacturer_Name=Vishay, Mouser Part Number=781-SI2301CDS-E3, Arrow Part Number=SI2301CDS-T1-E3, Arrow Price/Stock=https://www.arrow.com/en/products/si2301cds-t1-e3/vishay?region=nac, Datasheet Link=https://componentsearchengine.com/Datasheets/2/SI2301CDS-T1-E3.pdf, Height=1.12mm, Manufacturer_Part_Number=SI2301CDS-T1-E3, Mouser Price/Stock=https://www.mouser.co.uk/ProductDetail/Vishay-Semiconductors/SI2301CDS-T1-E3?qs=45wPT2wjtGkQH%252ByrbRpz4Q%3D%3D, Supplier 1=Mouser, Supplier Part Number 1=781-SI2301CDS-E3
R1 R2 R3 R4 R5 R6 R7 R8 R9 R10 R11 R12 R13 R14: library part R0402, "R0402", Height=0.4mm
RT1: "Thermistor", Manufacturer_Name=TDK, Mouser Part Number=810-NTCG103JX103DTDS, Arrow Part Number=NTCG103JX103DTDS, Arrow Price/Stock=https://www.arrow.com/en/products/ntcg103jx103dtds/tdk?region=nac, Datasheet Link=https://product.tdk.com/system/files/dam/doc/product/sensor/ntc/chip-ntc-thermistor/catalog/tpd_automotive_ntc-thermistor_ntcg_en.pdf, Height=0.55mm, Manufacturer_Part_Number=NTCG103JX103DTDS, Mouser Price/Stock=https://www.mouser.co.uk/ProductDetail/TDK/NTCG103JX103DTDS?qs=cNoPOocMWw0mnAOC7PMXMw%3D%3D, Supplier 1=Mouser, Supplier Part Number 1=810-NTCG103JX103DTDS
SW1: library part TS-1088R-02026, "Switch", Manufacturer_Name=XUNPU, Datasheet Link=https://datasheet.lcsc.com/szlcsc/1912111437_XUNPU-TS-1088R-02026_C455280.pdf, Manufacturer_Part_Number=TS-1088R-02026
SW2 SW3: library part EVP-BB0AAB000, "Switch", Manufacturer_Name=Panasonic, Mouser Part Number=667-EVP-BB0AAB000, Arrow Part Number=EVP-BB0AAB000, Arrow Price/Stock=https://www.arrow.com/en/products/evp-bb0aab000/panasonic?region=nac, Datasheet Link=https://componentsearchengine.com/Datasheets/1/EVP-BB0AAB000.pdf, Height=0.6mm, Manufacturer_Part_Number=EVP-BB0AAB000, Mouser Price/Stock=https://www.mouser.co.uk/ProductDetail/Panasonic/EVP-BB0AAB000?qs=PzGy0jfpSMt797eGA9Hkvg%3D%3D
TP1 TP2 TP3 TP4: library part TestPoint, "TestPoint"
U1: "Integrated Circuit", Manufacturer_Name="Texas Instruments", Mouser Part Number=595-BQ25303JRTER, Arrow Part Number=BQ25303JRTER, Arrow Price/Stock=https://www.arrow.com/en/products/bq25303jrter/texas-instruments?region=nac, Datasheet Link=https://www.ti.com/lit/ds/symlink/bq25303j.pdf?ts=1614639374775&ref_url=https%253A%252F%252Fwww.ti.com%252Fpower-management%252Fbattery-management%252Fcharger-ics%252Fproducts.html, Height=0.8mm, Manufacturer_Part_Number=BQ25303JRTER, Mouser Price/Stock=https://www.mouser.co.uk/ProductDetail/Texas-Instruments/BQ25303JRTER?qs=DRkmTr78QARA1C7%2F12q3og%3D%3D, Supplier 1=Mouser, Supplier Part Number 1=595-BQ25303JRTER
U2: "Integrated Circuit", Manufacturer_Name="Espressif Systems", Mouser Part Number=356-ESP32-S2FN4R2, Datasheet Link=https://www.espressif.com/sites/default/files/documentation/esp32-s2_datasheet_en.pdf, Height=0.9mm, Manufacturer_Part_Number=ESP32-S2FN4R2, Mouser Price/Stock=https://www.mouser.co.uk/ProductDetail/Espressif-Systems/ESP32-S2FN4R2?qs=pUKx8fyJudDnZ43tIkHUCQ%3D%3D, Supplier 1=Mouser, Supplier Part Number 1=356-ESP32-S2FN4R2
U3: "LCSC +3.3V LDO 500mA VDIF=120mV@100mA"
U4: "Integrated Circuit", Manufacturer_Name=Torex, Mouser Part Number=865-XC6136N35BNR-G, Datasheet Link=https://www.torexsemi.com/file/xc6136/XC6136.pdf, Height=1.1mm, Manufacturer_Part_Number=XC6136N35BNR-G, Mouser Price/Stock=https://www.mouser.co.uk/ProductDetail/Torex-Semiconductor/XC6136N35BNR-G?qs=T3oQrply3y%252BoEyjYGdDjug%3D%3D, Supplier 1=Mouser, Supplier Part Number 1=865-XC6136N35BNR-G
Y1: "Crystal or Oscillator", Manufacturer_Name=ECS, Mouser Part Number=520-EC4001037BCKYTR3, Arrow Part Number=ECS-400-10-37B-CKY-TR3, Arrow Price/Stock=https://www.arrow.com/en/products/ecs-400-10-37b-cky-tr3/ecs-international?region=nac, Datasheet Link=https://ecsxtal.com/store/pdf/ECX-1637B.pdf, Height=0.5mm, Manufacturer_Part_Number=ECS-400-10-37B-CKY-TR3, Mouser Price/Stock=https://www.mouser.co.uk/ProductDetail/ECS/ECS-400-10-37B-CKY-TR3?qs=TCDPyi3sCW2VtaBG%252B2IQWA%3D%3D, Supplier 1=Mouser, Supplier Part Number 1=520-EC4001037BCKYTR3

## Free pads (board coordinates)
  round 2.5 hole 1.7 mask+0.01: 2(73.875,90.225) 2(85.35,94.15) 2(91.475,68.9)

## Via types
v1: diameter 0.45, hole 0.2, Top Layer to Bottom Layer, tented both sides, 221 vias

## Nets (pads, with @x,y where several pads share a name; then routed paths per layer and width w, separated by ;. In a path a pad name is that pad's centre, name@x,y a point inside that pad or via, vN(x,y) a via of type N, cw(c..) or ccw(c..) an arc to the next point about the centre after c; other vN are vias at no path point)
+3V3: C6.1 C7.1 C8.1 C12.1 C13.1 C14.1 C16.1 C24.1 C25.1 C28.1 L2.1 LED1.1 LED3.1 R5.2 R8.1 SW1.2 TP3.1 U2.1 U2.20 U2.27 U2.45 U2.51 U2.54 U3.5 | length 80
  Top Layer w0.2: LED1.1 77.175,70.525 77.683,70.525 v1@77.71,70.552 ; v1@77.9,70.552 v1(77.9,70.6) ; R8.1 C24.1@78.525,73.67 ; 78.825,73.575 U2.20 ; 78.863,70.687 78.951,70.775 U2.27 ; L2.1 82.2,78.9 82.2,81.85 82.8,82.45 83.025,82.45 83.5,82.925 SW1.2@83.5,83.35 ; U2.1 85.55,76.75 85.72,76.75 85.793,76.823 ; U2.45 86.949,71.175 87,71.125 ; U2.51 86.949,73.575 87.012,73.512 ; U2.54 87.055,74.775 C6.1@87.115,74.835 ; LED3.1@88,68.65 v1@88,70.85 ; R5.2 92.8,75.45 v1@92.85,75.4
  Top Layer w0.35: C25.1 78.525,70.62 78.62,70.715 C25.1@78.785,70.715 ; C24.1 78.525,73.67 78.62,73.575 78.825,73.575 ; 87.09,71.14 87.28,71.14 87.375,71.045 C8.1 ; 87.103,73.528 87.115,73.515 87.28,73.515 87.375,73.42 C7.1 ; C6.1@87.115,74.835 87.28,74.835 87.375,74.93 C6.1
  Top Layer w0.5: C28.1 76.975,80.65 cw(c76.975,80.5) TP3.1@77.125,80.5 ; TP3.1 cw(c77.125,80.5) 77.15,80.5 v1@77.15,79.175 ; v1(77.9,70.6) C25.1@78.375,70.6 ; v1(77.9,73.675) 78.325,73.675 C24.1@78.35,73.7 ; C13.1@80.4,78.87 C14.1 81.24,78.87 81.245,78.875 L2.1@82.05,78.875 ; 85.725,76.8 85.95,77.025 87.215,77.025 C16.1 ; C16.1@87.191,77.025 v1(87.85,77.025) ; C6.1@87.5,74.925 87.525,74.95 v1(88,74.95) ; C7.1@87.55,73.4 v1(88,73.4) ; C8.1@87.575,71 v1(88,71)
  Layer 2 w0.2: v1@77.65,79.375 v1@77.675,79.4
  Layer 2 w0.5: v1(77.675,78.1) 77.8,77.975 78.332,77.975 78.625,77.682 78.625,75.425 79.45,74.6 79.45,70.593 80.093,69.95 85.075,69.95 86.125,71 v1(88,71) ; v1(77.675,78.7) 78.925,78.7 79.675,77.95 79.675,76.175 80.804,75.046 ccw(c81.157,75.4) 81.157,74.9 85.65,74.9 ; v1(77.675,79.3) 77.85,79.475 79.525,79.475 80.75,78.25 80.75,76.9 ccw(c81.075,76.9) 80.752,76.866 81.041,76.577 ccw(c81.075,76.9) 81.075,76.575 87.218,76.575 ccw(c87.218,77.075) 87.571,76.721 87.825,76.975 87.825,76.986 87.84,77.002 v1@87.86,77.002 ; v1(77.9,70.6) 79.35,70.6 79.425,70.675 ; v1(77.9,73.675) 79.4,73.675 79.425,73.7 ; v1(88,73.4) 87.99,73.39 85.943,73.39 85.65,73.683 85.65,74.9 ; v1(88,74.95) 87.25,74.95 86.975,75.225 85.65,75.225 85.65,74.9
  Bottom Layer w0.2: v1(88,74.95) 89.025,75.975 92.225,75.975 v1@92.775,75.425
  other v1: 92.8,75.4 77.075,78.1 77.075,78.7 77.075,79.3
ADC: R3.2 R6.1 U2.15 | length 2.6
  Top Layer w0.2: 78.871,75.575 79.116,75.575 U2.15
  Top Layer w0.4: R3.2 R6.1 78.721,75.575
ALARM: R9.1 U2.28 | length 12.5
  Top Layer w0.2: v1(79.325,69.55) U2.28@79.325,70.375
  Bottom Layer w0.2: v1(79.325,69.55) 79.7,69.925 79.7,80.15 80.325,80.775 v1(80.35,80.775)
BTN: C17.1 R2.1 R9.2 SW1.1 | length 8.3
  Top Layer w0.2: C17.1@77.775,84.01 78.575,84.01 79,83.585 SW1.1 ; R2.1 80.125,85.25 80.125,84.75 79.625,84.25 79.425,84.25 79,83.825 SW1.1 ; R9.2 81.25,81.5 80.3,82.45 79.425,82.45 79,82.875 SW1.1
D_N: CN3.2 D1.2 U2.25 | length 14.6
  Top Layer w0.118: CN3.2 70.816,72.391 70.816,72.982 70.886,73.052 70.886,73.489 70.5,73.875 70.5,74.375 70.911,74.786 70.911,75.029 70.675,75.265 70.675,75.28 70.675,75.32 70.756,75.401 70.817,75.401 70.886,75.47 70.886,75.761 71.278,76.153 73.444,76.153 74.911,74.686 78.108,71.489 78.923,71.489 78.968,71.534 U2.25@79.225,71.534
D_P: CN3.3 D1.1 U2.26 | length 14.3
  Top Layer w0.118: CN3.3 71.184,72.391 71.184,72.982 71.114,73.052 71.114,73.489 71.5,73.875 71.5,74.375 71.139,74.736 71.139,75.029 71.375,75.265 71.375,75.27 71.244,75.401 71.183,75.401 71.114,75.47 71.114,75.667 71.372,75.925 73.35,75.925 74.909,74.366 78.014,71.261 78.923,71.261 78.968,71.216 79.156,71.216 U2.26@79.225,71.147
EN: C23.1 R5.1 SW2.B2 U2.56 | length 8.3
  Top Layer w0.2: U2.56 86.4,75.9 86.825,76.325 89.525,76.325 90.325,77.125 SW2.B2 ; R5.1@91.913,76.037 91.913,77.113 SW2.B2 ; C23.1@92.75,77.125 92.745,77.13 91.93,77.13 SW2.B2
GND: C2.2 C3.2 C4.2 C5.2 C6.2 C7.2 C8.2 C9.2 C10.2 C11.2 C12.2 C13.2 C14.2 C15.2 C16.2 C17.2 C18.2 C19.2 C20.2 C21.2 C22.2 C23.2 C24.2 C25.2 C26.2 C27.2 C28.2 C29.2 C30.2 C31.2 C32.2 CN1.2 CN1.3 CN1.4 CN3.5 D1.3 D2.2 R1.2 R2.2 R6.2 R7.2 R11.2 R12.2 RF1.2 RT1.2 SW2.A1 SW2.A2 SW3.A1 SW3.A2 U1.6 U1.9 U1.11 U1.12 U1.17 U2.57 U3.2 U4.2 Y1.2 Y1.4 | length 21.7
  Top Layer w0.2: 70.7,76.45 70.85,76.45 71.05,76.65 71.3,76.65
  Top Layer w0.3: U1.12 70.4,88.025 70.425,88 70.425,87.95 ; U1.12@70.437,88.542 70.445,88.55 U1.11 70.9,87.3 U1.17 71.4,86.8 U1.6 73.5,86.8 73.625,86.675 R1.2@73.65,86.675 ; 71.875,87.95 71.9,87.975 U1.9@71.9,88.525 ; U1.9 U1.9@71.9,88.525 ; v1(72.45,88.5) 72.425,88.525 U1.9@71.9,88.525
  Top Layer w0.4: v1@72.625,71.409 CN3.5@72.625,72.625 ; CN3.5@72.625,71.875 CN3.5@72.625,72.625 ; v1@72.625,73.3 v1(72.625,73.275) CN3.5@72.625,72.625 ; v1(88.65,73.175) 89.232,73.175 Y1.2@89.249,73.158
  Top Layer w0.5: C26.2@67.075,73.175 67.1,73.15 v1(67.1,72.625) ; 67.6,84.475 67.625,84.45 v1(68.5,84.45) ; 67.95,83.375 C10.2 ; 68,82.175 v1(68.875,82.175) ; C27.2@68.676,78.07 68.696,78.05 v1(69.35,78.05) ; C11.2 69.546,84.561 v1@69.546,85.176 ; v1(70.7,71.05) v1@72,71.05 ; v1(71.35,71.05) v1@72,71.05 ; v1@72.6,71.325 cw(c72.325,71.325) 72.325,71.05 v1@72,71.05 ; v1(73.6,80.475) 74.213,80.475 C28.2@74.219,80.481 ; C28.2@74.206,80.522 74.225,80.503 v1@74.225,80.025 ; C29.2@74.837,82.735 74.85,82.748 v1(74.85,83.425) ; v1(74.875,86.4) R7.2 ; v1(78.525,69.2) C25.2 78.525,69.825 cw(c78.55,69.825) C25.2@78.55,69.85 ; C6.2@87.365,75.741 87.381,75.725 v1(88.025,75.725) ; C23.2 v1(92.825,77.925)
  Layer 2 w0.5: v1(67.1,72.625) 67.1,72.5 cw(c67.1,72.45) v1@67.15,72.45
  other v1: 82.175,67.725 82.175,68.525 87.375,69.6 72,71.075 72.625,71.275 91.8,71.55 92.55,71.55 81.7,71.75 82.95,71.75 84.175,71.75 82.325,72.325 83.6,72.325 89.125,72.45 88,72.625 81.7,72.975 82.95,72.975 84.175,72.975 72,73.4 82.325,73.575 83.6,73.575 72.45,73.875 71,74.12 81.7,74.2 82.95,74.2 84.175,74.2 77.9,74.425 91.175,74.625 90.725,75.35 68.625,75.425 69.3,75.425 68.625,76.05 77.675,76.475 68.625,76.675 88.624,77.149 81.45,77.275 82.1,77.275 82.75,77.275 71.275,77.7 86.125,77.7 87.875,77.8 88.625,77.875 84.475,78.28 73.95,78.4 72.475,78.45 73.225,78.45 83.931,78.637 87.65,78.875 84.475,79 74.15,79.1 86.5,79.25 83.925,79.425 80.35,79.65 81.225,79.65 83.35,79.675 87.725,79.675 74.225,79.85 86.95,79.9 86.125,79.925 84.325,79.95 83.7,80.4 86.85,80.7 87.725,80.7 79.35,80.725 78.725,80.75 84.3,80.75 83.65,81.125 86.925,81.35 86,81.45 84.325,81.65 87.625,81.675 83.65,81.925 86.275,82 87,82.1 84.4,82.525 85,82.975 77.65,83.075 68.875,83.35 85.65,83.425 84.425,83.6 86.45,83.6 87.275,83.65 85.1,84.025 71.888,84.252 85.975,84.325 86.825,84.325 87.55,84.425 84.4,84.6 77.775,84.75 85.4,84.925 87.225,85.1 86.35,85.125 69.55,85.175 81.725,85.35 76,85.4 70.6,86.5 71.7,86.5 73.675,86.7 71.15,87.075 70.6,87.6 71.7,87.6 78.275,91.675 78.925,91.675 79.55,91.675 80.175,91.675 77.65,92.3 78.3,92.3 78.925,92.3 79.55,92.3 80.175,92.3 76.75,92.625 75.85,92.725 77.65,92.9 78.3,92.9 78.925,92.9 79.55,92.9 80.175,92.9 77.07,93.284 75.825,93.325 76.456,93.308 78.15,93.625 79.25,93.625 78.7,93.925 77.064,93.958 75.825,93.975 76.42,93.97 78.15,94.225 79.25,94.225
GPIO0: SW3.B1 U2.5 | length 14.2
  Top Layer w0.2: v1(83.4,77.275) 83.434,77.241 83.709,77.241 83.95,77 U2.5@83.95,76.75 ; v1(91.8,72.9) SW3.B1 SW3.B1@91.804,73.579
  Bottom Layer w0.2: v1(83.4,77.275) 85.025,75.65 85.025,73.175 86.475,71.725 90.625,71.725 91.725,72.825 v1@91.725,72.875
IND: R14.2 U2.40 | length 3.2
  Top Layer w0.2: U2.40 84.75,68.2 85.125,67.825 86.4,67.825 R14.2
LB: R10.2 U4.3 | length 9.8
  Top Layer w0.2: v1(75.65,83.75) 75.65,83.275 75.7,83.225 U4.3@75.8,83.225
  Bottom Layer w0.2: R10.2 67.875,82.939 68,82.85 68.078,82.775 69.1,82.775 71.125,84.8 72.5,84.8 72.775,84.525 74.875,84.525 v1(75.65,83.75)
LNA: C20.1 L3.2 U2.2 | length 2.7
  Top Layer w0.2: U2.2 cw(c85.35,76.427) U2.2 85.15,77.375
  Top Layer w0.351: 85.15,77.375 85.15,78.183 cw(c85.501,78.183) C20.1@85.221,78.394 ; C20.1 L3.2
NetC1_1: C1.1 L1.1 U1.13 U1.14 | length 1.4
  Top Layer w0.3: C1.1 68.4,87.52 68.52,87.4 68.815,87.4 68.915,87.3 U1.14
NetC1_2: C1.2 U1.15 | length 1.3
  Top Layer w0.3: C1.2 68.44,86.8 U1.15
NetC2_1: C2.1 U2.53 Y1.1 | length 3.9
  Top Layer w0.15: U2.53 89.15,74.375 Y1.1@89.362,74.587
  Top Layer w0.2: C2.1 89.295,74.655 Y1.1@89.3,74.65
NetC3_1: C3.1 U2.52 Y1.3 | length 5.4
  Top Layer w0.15: U2.52 88.725,73.975 88.875,73.825 89.925,73.825 90.125,73.625 90.125,73.475 Y1.3 Y1.3@90.45,73.15
  Top Layer w0.2: C3.1 90.525,73.125 Y1.3@90.55,73.15
NetC5_1: C5.1 U1.16 | length 1.3
  Top Layer w0.3: C5.1 68.68,86.03 68.985,86.03 69.255,86.3 U1.16
NetC15_1: C15.1 L2.2 U2.3 U2.4 | length 4.8
  Top Layer w0.2: U2.4 84.35,77.125 ; 84.4,77.125 84.6,77.325 ; 84.45,77.35 84.733,77.067 ; U2.3 84.75,77.05
  Top Layer w0.5: L2.2@82.172,78 C15.1@83.135,78 ; C15.1 83.25,77.99 83.27,77.97 83.83,77.97 84.5,77.3 84.5,77.05
NetLED1_2: LED1.2 R10.1 | length 17.9
  Bottom Layer w0.2: R10.1 67.875,78.5 70.425,75.95 73.175,75.95 76.275,72.85 76.275,70.775 77.027,70.023 77.027,69.523 v1(77.075,69.475)
NetLED2_2: LED2.2 R13.1 | length 19.4
  Bottom Layer w0.2: R13.1 67.025,76.075 68.275,74.825 73.55,74.825 75.625,72.75 75.625,70.625 76.291,69.959 76.291,69.484 v1(76.3,69.475)
NetLED3_2: LED3.2 R14.1 | length 0.7
  Top Layer w0.2: R14.1 87.362,67.763 87.987,67.763 LED3.2@88.025,67.725
NetR1_1: R1.1 U1.4 | length 2
  Top Layer w0.3: U1.4 71.9,85.75 73.6,85.75 R1.1
NetR8_2: R8.2 U2.24 | length 1
  Top Layer w0.2: R8.2 78.6,71.975 U2.24
NTC: R4.2 R7.1 RT1.1 U1.7 | length 8.3
  Top Layer w0.3: U1.7 72.988,87.3 R7.1 ; R7.1@75.525,87.3 R7.1 ; v1(76.375,88.2) 76.35,88.175 R4.2 R7.1
  Bottom Layer w0.3: v1(76.375,88.2) 77.475,88.2 78.275,89 78.275,90.35 RT1.1@78.3,90.375
REGN: C18.1 LED2.1 R4.1 U1.2 | length 24.4
  Top Layer w0.2: v1(73.975,88.175) R4.1 ; LED2.1@76.275,70.475 76.325,70.475 76.375,70.525 76.375,70.825 76.577,71.027 76.877,71.027 v1(76.925,71.075)
  Top Layer w0.25: U1.2 70.925,85.525 70.925,85.015 70.995,84.945
  Top Layer w0.3: C18.1@71,84.445 71,84.9 ; v1@71.093,83.675 71.093,84.233 C18.1
  Layer 2 w0.3: v1(71.1,83.675) 71.1,84.895 72.786,86.581 72.786,87.685 73.23,88.129 v1@73.932,88.129
  Bottom Layer w0.2: v1(71.1,83.675) 71.1,78.85 76.925,73.025 v1(76.925,71.075)
RF: C19.1 L3.1 RF1.1 | length 26.7
  Top Layer w0.351: L3.1 C19.1 85.225,81.548 85.225,81.551 cw(c86.477,81.548) 86.477,82.8 RF1.1@89.925,82.8
  Top Layer w0.5: RF1.1@89.925,82.8 RF1.1@92.549,82.8 ; RF1.1@89.982,92.179 89.985,92.176 89.985,90.947 89.985,89.698 91.055,89.698 92.519,89.698 RF1.1@92.528,89.689 ; RF1.1@89.986,87.403 89.986,85 92.5,85 RF1.1@92.55,84.95 ; RF1.1@91.055,87.498 92.516,87.498 RF1.1@92.57,87.552 ; RF1.1@91.055,92.196 92.482,92.196 RF1.1@92.519,92.233 ; RF1.1@91.847,94.396 92.624,94.396 RF1.1@92.624,93.296 ; RF1.1@92.624,82.75 RF1.1@92.624,83.14
  Top Layer w0.9: 90.55,80.7 92.349,80.7
SGND: C31.1 C32.1 CN3.6 CN3.7 CN3.8 CN3.9 CN3.10 CN3.11 R11.1 | length 151.9
  Top Layer w0.5: v1(66.05,74.925) v1@66.05,76.933 ; v1(66.05,80.925) v1(66.05,82.925) ; v1@66.05,80.933 v1(66.05,78.925) v1@66.05,76.933 ; v1@66.05,82.933 66.05,84.933 v1(66.05,86.925) 66.05,88.933 v1(66.05,90.925) 66.05,92.933 v1(66.05,94.925) 66.05,95.225 cw(c66.65,95.225) 66.65,95.825 v1(67.35,95.825) v1(69.35,95.825) v1(71.35,95.825) v1(73.35,95.825) v1(75.35,95.825) v1(77.35,95.825) v1(79.35,95.825) ; CN3.8@67.825,69.275 CN3.8 ; CN3.8@67.949,68.724 67.936,68.718 cw(c67.732,69.175) 67.732,68.675 66.55,68.675 cw(c66.55,69.175) v1(66.05,69.175) 66.05,70.933 v1(66.05,72.925) v1@66.05,76.933 ; 73.925,69.075 ccw(c74.225,69.075) 74.225,68.775 CN3.11@74.925,68.775 ; CN3.11@74.825,69.233 ccw(c75.325,69.233) CN3.11@74.993,68.859 ; CN3.11 CN3.11@74.869,69.594 ; CN3.11@74.85,69.15 ccw(c75.225,69.15) CN3.11@75.225,68.775 ; CN3.11@74.977,69.348 74.981,69.344 75.169,69.095 CN3.11@75.026,69.283 ; 75.225,68.65 v1(75.875,68.65) 76.519,68.65 ; 76.522,68.65 cw(c76.521,67.614) 77.257,68.343 v1(77.425,68.175) 78.365,67.235 ccw(c79.219,68.089) v1@78.8,66.956 ; v1(78.775,66.975) ccw(c78.993,67.425) 78.993,66.925 v1(80.925,66.925) ; v1@78.925,66.922 v1@80.925,66.922 ; v1@78.993,66.922 v1@80.925,66.922 ; v1(93.45,69.725) v1(93.45,67.725) 93.45,67.575 cw(c92.797,67.575) 92.797,66.922 90.925,66.922 88.925,66.922 86.925,66.922 84.925,66.922 82.925,66.922 v1@80.925,66.922
  Top Layer w1.1: CN3.8 CN3.9 ; 68.85,69.55 CN3.9 ; CN3.9@70.925,69.55 CN3.10 ; 73.825,69.55 CN3.11@74.665,69.55 ; 73.925,69.55 CN3.11@74.665,69.55 ; CN3.9 CN3.10 ; CN3.10 CN3.11@74.665,69.55
  Top Layer w1.3: CN3.6 68.85,72.225 68.85,69.825 ; CN3.7@73.796,72.221 CN3.7 ; 73.825,70.027 CN3.7@73.825,72.175
  Bottom Layer w0.5: v1@66.039,69.175 66.039,70.925 66.039,72.925 66.039,74.925 66.039,76.925 66.039,78.925 66.039,80.933 66.039,80.925 66.039,82.925 66.039,82.933 66.039,84.931 66.039,86.931 66.039,88.931 66.039,90.931 66.039,92.931 66.039,94.931 66.039,95.225 cw(c66.639,95.225) 66.639,95.825 v1(67.35,95.825) v1(69.35,95.825) v1(71.35,95.825) v1(73.35,95.825) v1(75.35,95.825) v1(77.35,95.825) v1@79.339,95.825 ; v1(66.05,69.175) CN3.8@67.75,69.175 ; CN3.11@74.85,69.15 ccw(c75.225,69.15) CN3.11@75.225,68.775 ; CN3.11@75.025,68.8 75.175,68.65 75.225,68.65 v1(75.875,68.65) 76.519,68.65 76.522,68.65 cw(c76.521,67.614) 77.257,68.343 v1(77.425,68.175) 78.365,67.235 ccw(c79.219,68.089) v1@78.8,66.956 ; v1(78.775,66.975) v1(78.775,66.975) ccw(c78.993,67.425) 78.993,66.925 v1(80.925,66.925) v1(82.925,66.925) v1(84.925,66.925) v1(86.925,66.925) v1(88.925,66.925) v1(90.925,66.925) 92.79,66.925 ccw(c92.79,67.578) 93.444,67.578 93.444,67.725 v1@93.444,69.728
  other v1: 92.925,66.925 71.93,69.456 69.95,69.52 70.925,69.515 66.05,70.925 66.05,76.925 66.05,84.925 66.05,88.925 66.05,92.925
STAT: R13.2 U1.3 | length 11
  Top Layer w0.2: U1.3 71.45,85.5 71.45,84.937 71.567,84.82 73.294,84.82 v1(73.579,85.104)
  Bottom Layer w0.2: R13.2 67.133,82.958 67.133,83.283 67.725,83.875 69.125,83.875 70.8,85.55 73.125,85.55 73.571,85.104 v1(73.579,85.104)
VBAT: C4.1 C29.1 CN1.1 L1.2 Q1.3 R3.1 TP1.1 TP4.1 U1.10 U4.4 | length 29.4
  Top Layer w0.3: v1(67.9,93.6) L1.2@69.65,93.6 ; 71.384,93.666 71.4,93.65 U1.10 ; U4.4@75.975,81.9 75.987,81.912 76.663,81.912 v1(76.675,81.9) ; R3.1 76.775,77.05 v1@76.8,77.075
  Top Layer w0.4: 75.9,91.725 75.95,91.775 76.7,91.775 v1(76.75,91.825)
  Top Layer w0.5: v1(73.9,83.9) 74.675,84.675 TP1.1
  Top Layer w1: L1.2 69.65,93.95 71.38,93.95 71.4,93.93 ; 71.175,93.93 71.4,93.93 ; C4.1@72.864,93.914 73.336,93.914 75.52,91.73 75.9,91.73 ; 73.12,93.93 71.4,93.93
  Layer 2 w0.15: 68.3,83.8 68.557,83.8 68.782,84.025 69.025,84.025 ; 68.552,82.75 69.25,82.75 69.3,82.8 ; 68.975,84.875 68.975,84.85 69.147,84.678
  Bottom Layer w0.2: TP4.1 76.75,90.575 v1(76.75,91.825)
  Bottom Layer w0.3: v1(76.675,81.9) 77.375,81.9 78,81.275 78,80.45 78.85,79.6 78.85,77.825 78.125,77.1 v1(76.775,77.1)
  other v1: 73.3,82.7 73.9,82.7 73.3,83.3 73.9,83.3 73.332,83.868 67.3,93.6 67.3,94.2 67.9,94.2 67.3,94.8 67.9,94.8
VBUS: C26.1 C27.1 CN3.1 D2.1 D3.2 D4.2 TP2.1 | length 6.1
  Top Layer w0.3: 67.275,77.2 67.8,77.2 67.945,77.345 69.58,77.345 69.757,77.168 70.307,77.168 D4.2
  Top Layer w0.4: D2.1@69.45,73.8 69.975,73.275 69.975,73.25 70.025,73.2 CN3.1
  Top Layer w0.5: 67.55,74.15 67.64,74.06 ; 67.85,73.95 67.85,73.27 67.87,73.25 C26.1 ; 68.015,73.95 68.015,74.135 ; 68.035,73.55 68.125,73.55
VDD_SPI: C21.1 C22.1 U2.30 | length 1.8
  Top Layer w0.2: U2.30 80.75,68.874 80.752,68.872
  Top Layer w0.35: C22.1 80.74,67.73 80.74,68.52 C21.1 80.752,68.532 80.752,68.872
VIN: C9.1 C10.1 C11.1 C30.1 D3.1 D3.3 Q1.2 U1.1 U3.1 U3.3 | length 13.1
  Top Layer w0.2: C30.1 71.275,78.47 71.445,78.3 71.669,78.3 71.797,78.172 71.845,78.124 71.845,77.705 72.025,77.525 U3.3@72.675,77.525
  Top Layer w0.5: C10.1 70.295,83.395 70.295,84.53 C11.1 70.3,84.565 U1.1@70.3,85.533 ; C30.1@71.275,78.696 71.275,79.7 71.556,79.981 Q1.2@71.556,80.929
  Top Layer w0.6: C9.1@70.245,82.145 C9.1 C10.1 ; U3.3@72.65,77.5 U3.3
  Top Layer w1: D3.3 69.475,79.7 69.725,79.95 69.725,79.975 69.95,80.2 69.95,81.575 C9.1@70.175,81.8 ; D3.3@69.72,79.641 69.72,79.695 69.725,79.7 D3.1 71.275,79.7 72.175,79.7 U3.1@72.275,79.6
VIN_GATE: D4.1 Q1.1 R12.1 | length 21
  Top Layer w0.3: D4.1@70.3,77.85 v1(70.3,78.45) ; v1(76.825,83.05) 76.825,84.424 76.825,84.625 R12.1@76.925,84.725
  Layer 2 w0.4: v1(70.3,78.45) 70.3,77.475 70.95,76.825 73.825,76.825 75.525,78.525 75.525,82.25 76.325,83.05 v1(76.825,83.05)
  Bottom Layer w0.3: v1(71.8,82.925) 71.815,82.91 71.815,82.585 72.6,81.8 75.15,81.8 76.4,83.05 v1(76.825,83.05)
pads on no net: CN3.4 SW2.B1 SW3.B2 U1.5 U1.8 U2.6 U2.7 U2.8 U2.9 U2.10 U2.11 U2.12 U2.13 U2.14 U2.16 U2.17 U2.18 U2.19 U2.21 U2.22 U2.23 U2.29 U2.31 U2.32 U2.33 U2.34 U2.35 U2.36 U2.37 U2.38 U2.39 U2.41 U2.42 U2.43 U2.44 U2.46 U2.47 U2.48 U2.49 U2.50 U2.55 U3.4 U4.1

## Polygon pours and split planes (outlines as drawn)
GND on Top Layer "NONET_L-01_P-001" (solid, pour order 10): 87.95,97.1 86.275,98.775 64.85,98.775 63.8,97.725 63.8,67.5 66.825,64.475 95.625,64.475 95.625,77.325 94.425,78.525 87.95,78.525
NetC1_1 on Top Layer "NONET_L-01_P-001" (solid, pour order 0): 70.05,87.15 69.051,87.15 69.055,87.416 66.784,87.416 cw(c66.784,87.55) 66.65,87.55 66.65,90.85 cw(c66.775,90.85) 66.775,90.975 69.9,90.975 cw(c69.9,90.825) 70.05,90.825
VBUS on Top Layer "NONET_L-01_P-001" (solid, pour order 4): 68.938,71.687 68.075,71.687 68.075,73 65.838,73 65.838,80.512 67.35,80.512 68.075,80.512 68.075,75.025 ccw(c68.275,75.025) 68.275,74.825 68.8,74.825 70.225,73.4 70.225,71.687
VBAT on Top Layer "NONET_L-01_P-001" (solid, pour order 3): 72.905,84.225 72.905,81.675 ccw(c73.03,81.675) 73.03,81.55 76.18,81.55 ccw(c76.18,81.675) 76.305,81.675 76.305,82.125 ccw(c76.18,82.125) 76.18,82.25 74.355,82.25 cw(c74.355,82.375) 74.23,82.375 74.23,84.2 ccw(c74.08,84.2) 74.08,84.35 73.03,84.35 ccw(c73.03,84.225)
VBAT on Top Layer "NONET_L-01_P-001" (solid, pour order 8): 68.475,95.15 67.025,95.15 ccw(c67.025,95.05) 66.925,95.05 66.925,93.3 ccw(c67.025,93.3) 67.025,93.2 68.475,93.2 ccw(c68.475,93.3) 68.575,93.3 68.575,95.05 ccw(c68.475,95.05)
+3V3 on Top Layer "NONET_L-01_P-001" (solid, pour order 2): 74.65,78.5 ccw(c74.825,78.5) 74.825,78.325 76.019,78.325 cw(c76.019,77.828) 76.371,78.179 76.729,77.821 ccw(c77.021,78.112) 77.021,77.7 81.125,77.7 ccw(c81.125,78.15) 81.575,78.15 81.575,79 79.7,79 cw(c79.7,79.075) 79.625,79.075 79.625,79.575 ccw(c79.475,79.575) 79.475,79.725 74.7,79.725 ccw(c74.7,79.675) 74.65,79.675
GND on Layer 2 "NONET_L-01_P-001" (solid, pour order 12): 87.975,97.225 86.3,98.9 64.875,98.9 63.825,97.85 63.825,67.625 66.85,64.6 95.65,64.6 95.65,77.45 94.45,78.65 87.975,78.65
VBAT on Layer 2 "NONET_L-01_P-001" (solid, pour order 11): 66.53,95.18 66.53,80.07 ccw(c66.675,80.07) 66.675,79.925 71.888,79.925 ccw(c71.888,80.799) 72.506,80.181 74.209,81.884 ccw(c73.566,82.527) 74.475,82.527 74.475,84.25 ccw(c74.375,84.25) 74.375,84.35 73.1,84.35 ccw(c73.1,83.65) 72.4,83.65 72.4,82.725 cw(c72.202,82.725) 72.202,82.527 70.623,82.527 cw(c70.623,82.675) 70.475,82.675 70.475,85.975 70.475,95.175 ccw(c70.305,95.175) 70.305,95.345 66.695,95.345 ccw(c66.695,95.18)
+3V3 on Layer 2 "NONET_L-01_P-001" (solid, pour order 9): 78.025,79.725 cw(c78.025,79.65) 78.1,79.65 78.1,77.8 cw(c78.025,77.8) 78.025,77.725 76.75,77.725 cw(c76.75,77.8) 76.675,77.8 76.675,78.175 76.675,79.65 cw(c76.75,79.65) 76.75,79.725
GND on Layer 1 "NONET_L-01_P-001" (solid, pour order 1): 87.975,97.225 86.3,98.9 64.875,98.9 63.825,97.85 63.825,67.625 66.85,64.6 95.65,64.6 95.65,77.45 94.45,78.65 87.975,78.65
GND on Layer 3 "NONET_L-01_P-001" (solid, pour order 14): 87.975,97.225 86.3,98.9 64.875,98.9 63.825,97.85 63.825,67.625 66.85,64.6 95.65,64.6 95.65,77.45 94.45,78.65 87.975,78.65
GND on Layer 4 "NONET_L-01_P-001" (solid, pour order 15): 87.975,97.225 86.3,98.9 64.875,98.9 63.825,97.85 63.825,67.625 66.85,64.6 95.65,64.6 95.65,77.45 94.45,78.65 87.975,78.65
GND on Bottom Layer "NONET_L-01_P-001" (solid, pour order 13): 87.975,97.225 86.3,98.9 64.875,98.9 63.825,97.85 63.825,67.625 66.85,64.6 95.65,64.6 95.65,77.45 94.45,78.65 87.975,78.65

## Other copper
Top Layer:
  pour cut-out: 66.65,87.05 67.8,87.05 67.8,85.175 68.875,85.175 68.875,84.775 66.65,84.775
  pour cut-out: 71.875,90.725 71.875,93.425 66.6,93.425 66.6,90.725
Layer 1:
  pour cut-out: 64.788,97.65 66.85,97.65 66.85,70.875 67.888,70.875 cw(c67.888,69.975) 68.788,69.975 ccw(c68.963,69.975) 68.963,69.8 76.763,69.8 cw(c76.763,68.776) 77.488,69.5 78.669,68.319 ccw(c80.465,70.115) 80.465,67.575 90.563,67.575 cw(c90.563,67.35) 90.788,67.35 90.788,66.025 cw(c90.588,66.025) 90.588,65.825 66.163,65.825 cw(c66.162,67.2) 64.788,67.2
  pour cut-out: 80.025,95.3 cw(c79.925,95.3) 79.925,95.2 68,95.2 cw(c68,95.4) 67.8,95.4 67.8,96.6 cw(c67.95,96.6) 67.95,96.75 79.95,96.75 cw(c79.95,96.675) 80.025,96.675
Layer 2:
  pour cut-out: 64.875,80.5 66,80.5 cw(c66,80.3) 66.2,80.3 66.2,80.025 ccw(c66.525,80.025) 66.525,79.7 cw(c66.525,79.55) 66.675,79.55 66.675,71.6 ccw(c67.4,71.6) 67.4,70.875 67.875,70.875 cw(c67.875,69.975) 68.775,69.975 ccw(c68.95,69.975) 68.95,69.8 76.751,69.8 cw(c76.751,68.776) 77.475,69.5 78.656,68.319 ccw(c80.452,70.115) 80.452,67.575 90.55,67.575 cw(c90.55,67.35) 90.775,67.35 90.775,66.025 cw(c90.575,66.025) 90.575,65.825 66.15,65.825 cw(c66.15,67.2) 64.775,67.2 64.775,80.4 cw(c64.875,80.4)
  pour cut-out: 80.025,95.3 cw(c79.925,95.3) 79.925,95.2 69.15,95.2 cw(c69.15,95.375) 68.975,95.375 68.975,96.65 cw(c69.075,96.65) 69.075,96.75 79.95,96.75 cw(c79.95,96.675) 80.025,96.675
Layer 3:
  pour cut-out: 64.794,97.65 66.856,97.65 66.856,70.875 67.894,70.875 cw(c67.894,69.975) 68.794,69.975 ccw(c68.969,69.975) 68.969,69.8 76.769,69.8 cw(c76.77,68.776) 77.494,69.5 78.675,68.319 ccw(c80.471,70.115) 80.471,67.575 90.569,67.575 cw(c90.569,67.35) 90.794,67.35 90.794,66.025 cw(c90.594,66.025) 90.594,65.825 66.169,65.825 cw(c66.169,67.2) 64.794,67.2
  pour cut-out: 80.025,95.3 cw(c79.925,95.3) 79.925,95.2 68,95.2 cw(c68,95.4) 67.8,95.4 67.8,96.6 cw(c67.95,96.6) 67.95,96.75 79.95,96.75 cw(c79.95,96.675) 80.025,96.675
Layer 4: